# Allegro board datalogger.brd
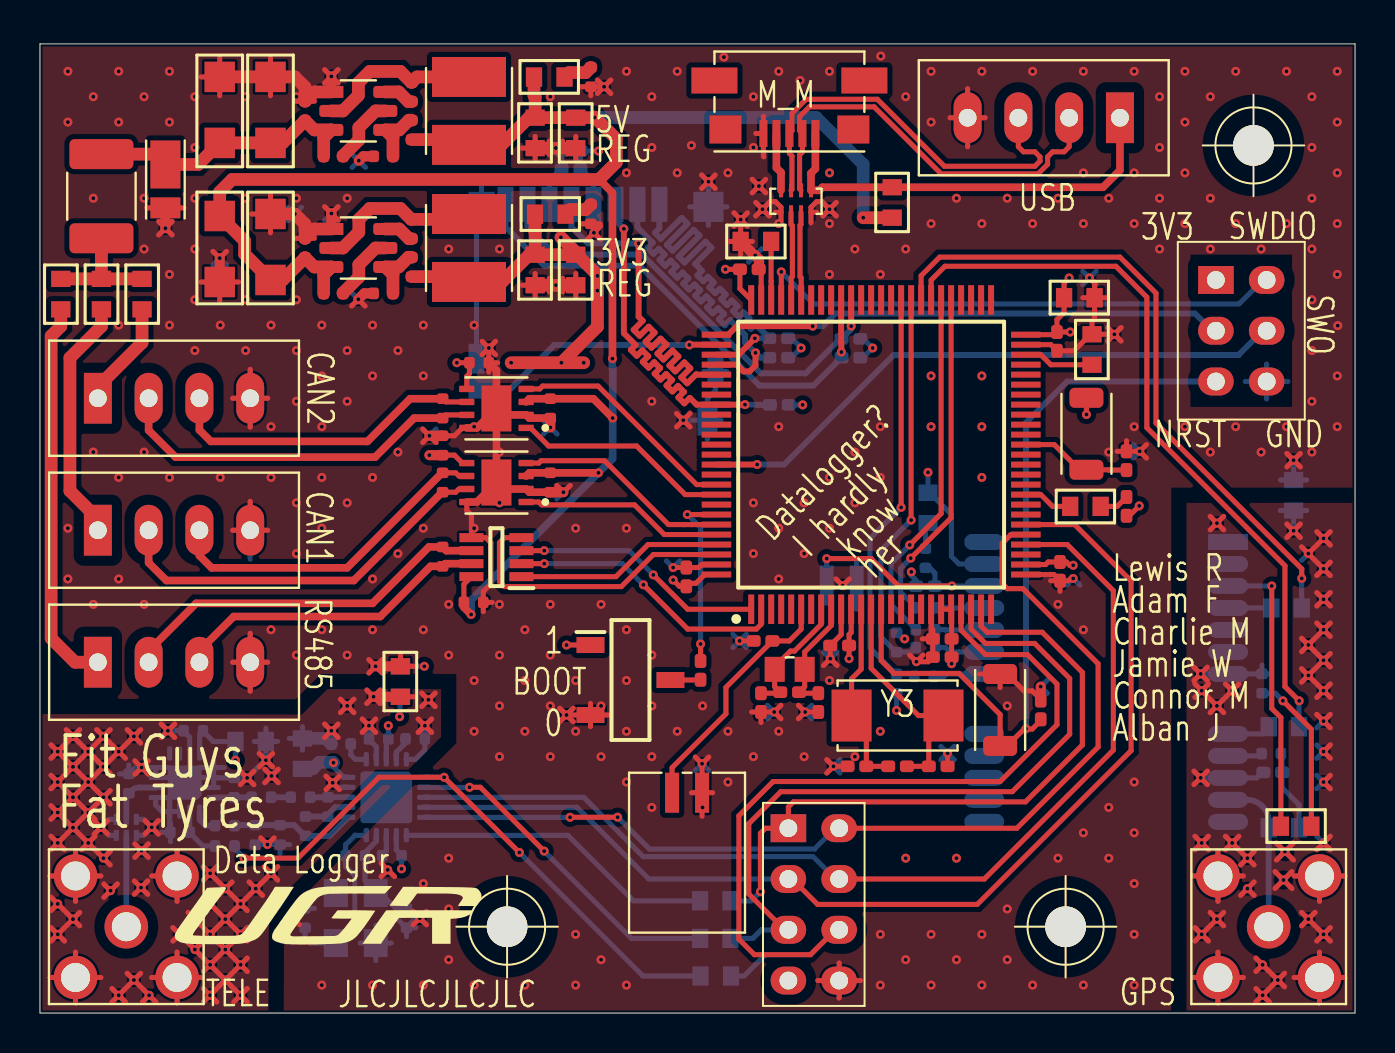
[diagram p0: board, top side]
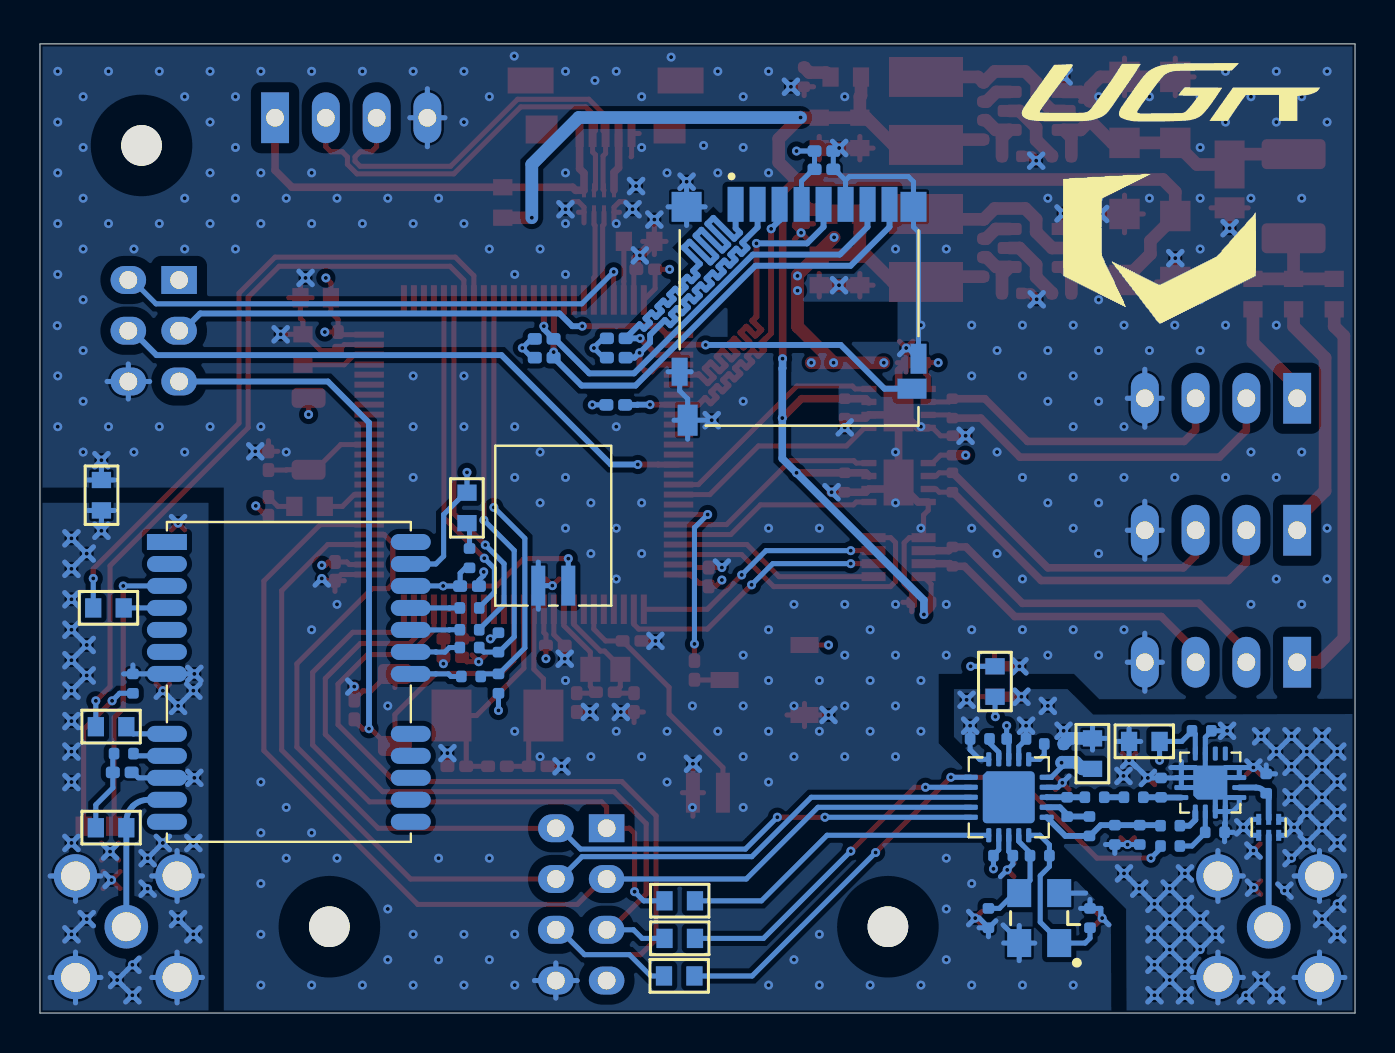
[diagram p1: board, bottom side, seen from below]

Outline 65.79 x 48.49 mm; copper layers: TOP, LAYER2, GNDS, BOTTOM. Coordinates in mm from the lower left corner of the outline.
Outline path: 0,48.49 0,0 65.79,0 65.79,48.49 0,48.49

## Design rules (mm)
constraint set DEFAULT: min track width 0.127, pair gap 0.127
net group D: nets D+ D-
net group DP1: nets N883057 N883071

## Placement (name value [footprint] x y rotation side)
BT1  MS518SE-FL35E  [SEIKO_MS518SE-FL35E]  40.11 28.38 270 bottom
BT2  MS518SE-FL35E  [SEIKO_MS518SE-FL35E]  32.37 4.02 90 top
C1  10u  [GU-C1206]  8.99 46.84 270 top
C2  10u  [GU-C1206]  11.53 46.84 270 top
C3  0.1u  [GU-R0402]  18.6 46.09 270 top
C4  22u  [GU-R0603]  24.77 44.8 270 top
C5  22u  [GU-R0603]  26.8 44.8 270 top
C6  22u  [GU-R0603]  24.77 37.94 270 top
C7  22u  [GU-R0603]  26.8 37.94 270 top
C8  0.1u  [GU-R0402]  18.6 39.23 270 top
C9  10u  [GU-C1206]  8.99 36.58 90 top
C10  10u  [GU-C1206]  11.53 39.98 270 top
C11  0.1u  [GU-R0402]  13.26 45.14 270 top
C12  0.1u  [GU-R0402]  13.26 38.28 270 top
C13  33n  [GU-R0402]  18.77 13.72 0 bottom
C14  1n  [GU-R0402]  17.6 7.87 0 bottom
C15  1u  [GU-R0603]  9.78 13.59 0 bottom
C16  10n  [GU-R0402]  16.94 13.72 0 bottom
C17  220p  [GU-R0402]  7.67 14.12 180 bottom
C18  1.5p  [GU-R0402]  11.07 10.79 0 bottom
C19  0.3p  [GU-R0402]  4.45 11.48 270 bottom
C24  1p  [GU-R0402]  9.7 11.28 270 bottom
C25  8p  [GU-R0402]  18.34 4.75 90 bottom
C26  2.2n  [GU-R0402]  12.01 8.92 90 bottom
C27  4.7p  [GU-R0402]  10.77 8.92 90 bottom
C28  8p  [GU-R0402]  13.26 4.75 270 bottom
C53  0.1u  [GU-R0402]  25.53 26.54 270 top
C54  0.1u  [GU-R0402]  20.14 28.4 270 top
C55  0.1u  [GU-R0402]  21.69 20.55 0 top
C56  0.1u  [GU-R0402]  25.53 30.25 270 top
C57  0.1u  [GU-R0402]  21.97 32.54 180 top
C86  4.7u  [GU-C0603]  52.76 35.79 180 top
C87  100n  [GU-C0402]  40.01 18.39 0 top
C88  100n  [GU-C0402]  51.03 22.1 90 top
C89  100n  [GU-C0402]  50.88 33.6 90 top
C90  100n  [GU-C0402]  35.48 37.21 180 top
C91  100n  [GU-C0402]  32.33 21.82 270 top
C97  1uF  [GU-C0402]  36.17 18.62 0 top
C100  1uF  [GU-C0402]  45.14 18.72 0 top
C101  100nF  [GU-C0402]  45.14 17.81 0 top
C102  1n  [GU-C0402]  26.57 43.13 0 bottom
C103  1n  [GU-C0402]  26.57 42.21 0 bottom
C104  12.5p  [GU-C0402]  36.07 15.53 90 top
C105  2.2u  [GU-C0603]  35.05 38.61 0 top
C106  12.5p  [GU-C0402]  38.94 15.53 90 top
C107  18p  [GU-C0402]  40.87 12.34 0 top
C108  18p  [GU-C0402]  44.93 12.34 180 top
C110  100n  [GU-C0402]  50.06 15.16 270 top
C111  2.2u  [GU-C0603]  52.63 33.96 270 top
C112  47p  [GU-C0402]  61.67 12.04 0 bottom
C113  1u  [GU-C0402]  44.3 21.36 0 bottom
C114  4.7u  [GU-C0603]  13.13 13.74 270 bottom
D1  Green  [GU-C0603]  51.54 25.35 0 top
D2  RED_LED  [GU-R0603]  63.6 9.35 180 top
D3  YELLOW_LED  [GU-R0603]  26.29 39.97 180 top
D5  NSR20F30NXT5G  [GU-C0603]  44.42 26.04 270 bottom
D7  LED_BLUE  [GU-R0603]  26.24 46.83 180 top
D8  NSR20F30NXT5G  [GU-C0603]  3.07 35.21 90 top
D9  MM3Z15VT1G  [DIODES-DFLZ15-7]  6.27 41.71 90 top
D10  NSR20F30NXT5G  [GU-C0603]  5.11 35.21 90 top
D12  NSR20F30NXT5G  [GU-C0603]  1.04 35.21 90 top
D14  NSR20F30NXT5G  [GU-C0603]  42.63 41.32 270 top
F1  1206L075/16WR  [FUSC455X324X85L30]  3.07 40.87 270 top
GPS1  NE0-M9N  [UBLOX_NEO-M9N-00BGNSS]  53.34 16.57 90 bottom
J2  Backup_Tele_Header  [GU-HEADER8]  37.44 9.25 0 top
J4  1981584-1  [TE-1981584-1]  37.49 48.11 180 top
J5  SMA  [GU_SMA_JACK_STR]  4.32 4.32 0 top
J10  CANFD1  [RHDRV4W90P254_4X1]  2.9 24.16 0 top
J19  SWD  [GU-HEADER6]  58.83 36.68 0 top
J20  CANFD2  [RHDRV4W90P254_4X1]  2.9 30.76 0 top
J22  SMA  [GU_SMA_JACK_STR]  61.47 4.32 0 top
J24  RS-485  [RHDRV4W90P254_4X1]  2.9 17.55 0 top
J25  USB Header  [RHDRV4W90P254_4X1]  54.03 44.79 180 top
J26  Micro SD  [HRS_DM3D-SF]  27.79 40.46 0 bottom
L1  4.7u  [INDDFN2_400X400X310L157X370]  21.46 45.14 270 top
L2  4.7u  [INDDFN2_400X400X310L157X370]  21.46 38.28 270 top
L3  3.9n  [GU-R0402]  13.03 10.79 180 bottom
L6  8.2n  [GU-R0402]  14.4 10.31 270 bottom
L7  2.7n  [GU-R0402]  13.28 9.35 270 bottom
L8  30ohms/1.8A  [GU-R0603]  61.47 9.27 0 bottom
NOREF  -  [unnamed]  60.71 43.41 0 top
NOREF#2  -  [#2]  14.25 4.75 0 top
NOREF#3  -  [unnamed]  51.31 4.32 0 top
NOREF#4  -  [unnamed]  23.37 4.32 0 top
NOREF#5  -  [#2]  14.66 34.42 180 bottom
NOREF#6  -  [#2]  9.17 45.92 180 bottom
R1  10k  [GU-R0402]  14.68 42.87 0 top
R2  54.9k  [GU-R0402]  18.6 44.19 270 top
R3  10k  [GU-R0402]  17.17 42.87 0 top
R4  33.2k  [GU-R0402]  18.6 37.33 270 top
R5  10k  [GU-R0402]  17.17 36.01 0 top
R6  10k  [GU-R0402]  14.68 36.01 0 top
R9  22k  [GU-R0402]  15.06 13.46 180 bottom
R10  1k  [GU-R0402]  9.25 9.37 0 bottom
R11  1k  [GU-R0402]  9.25 8.36 180 bottom
R12  20k  [GU-R0402]  7.01 9.04 0 bottom
R13  1M  [GU-R0402]  15.77 7.87 0 bottom
R15  10k  [GU-C0402]  54.36 27.64 90 top
R16  1M  [GU-C0402]  42.9 12.34 0 top
R17  1M  [GU-C0402]  37.5 16.05 0 top
R26  120  [GU-R0402]  20.14 26.54 90 top
R28  120  [GU-R0402]  20.14 30.25 90 top
R46  10k  [GU-C0402]  33.05 17.14 270 top
R53  150  [GU-C0402]  54.36 25.35 270 top
R54  85  [GU-R0402]  27.56 46.83 90 top
R55  65  [GU-R0402]  27.56 39.97 90 top
R56  55  [GU-R0402]  61.14 16.48 270 bottom
R58  2.2k  [GU-R0402]  42.85 18.54 90 bottom
R59  2.2k  [GU-R0402]  42.85 16.48 270 bottom
R60  1.5k  [GU-R0402]  44.3 22.76 90 bottom
R61  10  [GU-R0402]  61.59 12.98 180 bottom
R63  33  [GU-R0402]  44.22 16.84 180 bottom
R64  33  [GU-R0402]  44.3 18.29 180 bottom
R65  33  [GU-R0402]  44.3 19.18 180 bottom
R66  33  [GU-R0402]  44.3 20.27 180 bottom
R68  0  [GU-R0603]  61.47 14.33 0 bottom
R69  0  [GU-R0603]  61.6 20.27 0 bottom
R70  47k  [GU-C0402]  36.96 33.76 180 bottom
R71  47k  [GU-C0402]  36.96 32.79 180 bottom
R72  47k  [GU-C0402]  36.98 30.43 180 bottom
R73  47k  [GU-C0402]  40.56 33.73 180 bottom
R74  47k  [GU-C0402]  40.56 32.79 180 bottom
R75  120  [GU-R0402]  20.14 22.83 270 top
R76  0  [GU-R0603]  33.02 5.61 0 bottom
R77  0  [GU-R0603]  33.05 1.85 0 bottom
R78  0  [GU-R0603]  33.02 3.73 0 bottom
R79  0  [GU-R0603]  62.71 25.15 90 bottom
R81  0  [GU-R0603]  18.01 17.35 270 bottom
R82  0  [GU-R0603]  18.03 17.35 270 top
SW2  TDD01H0SB1R  [SOT175P420X230-3N]  29.54 16.66 0 top
SW3  B3U-1000P  [OMRON_B3U-1000P]  52.35 28.98 270 top
SW4  B3U-1000P  [OMRON_B3U-1000P]  48.03 15.16 270 top
U1  TPS56220XXX  [SOT23-6P95_280X145L45X37]  15.93 45.14 270 top
U2  TPS56220XXX  [SOT23-6P95_280X145L45X37]  15.93 38.28 270 top
U3  ECMF02-4CMX8  [SON8P50_250X120X55L40X20]  37.82 40.61 180 top
U4  nRF24L01  [QFN21P50_400X400X95L40X24T260N]  17.32 10.79 270 bottom
U5  RFX2401C  [QFN17P50_300X300X55L40X25T170]  7.24 11.53 270 bottom
U8  MCP2562FD-E/MF  [SON65P300X300X80-9N]  22.83 26.54 180 top
U10  MCP2562FD-E/MF  [SON65P300X300X80-9N]  22.83 30.25 180 top
U12  2450LP14A100T  [RESCAXE6P50_160X80X70L15X20]  4.32 9.29 0 bottom
U13  STM32H743VIT6  [QFP50P1600X1600X160-100N]  41.58 27.94 90 top
U14  MAX3062EEKA+T  [SOT65P280X145-8N]  22.83 22.81 180 top
Y2  16MHz  [SG-310]  15.8 4.75 90 bottom
Y3  25MHz  [XTALDFN2_600X350X140]  42.9 14.88 0 top
Y4  32.768KHz  [X2-SMD-L20X12X055MM]  37.5 17.2 0 top

## Library data of the parts
BT1 BT2 = BATTERY
C1-C19 C24-C28 C53-C57 C86-C91 C97 C100-C108 C110-C114 = C
D1-D3 D7 = LED
D5 = DIODE SCHOTTKY13_0
D8 D10 D12 D14 = DIODE SCHOTTKY
D9 = DIODE ZENER
F1 = FUSE
GPS1 = NE0-M9N_2
J2 = CON8
J4 J5 J22 = CON5
J10 J20 J24 J25 = CON4
J19 = CON6
J26 = CON14_13
L1-L3 L6 L7 = L
L8 = CHOKE FERRITE
R1-R6 R9-R13 R15-R17 R26 R28 R46 R53-R56 R58-R61 R63-R66 R68-R79 R81 R82 = R
SW2 = SW KEY-SPDT_0
SW3 SW4 = SW KEY-SPST
U1 U2 = TPS56220_0
U3 = DDProtec_0
U4 = NRF24L01P-R_1
U5 = RFX2401C_0
U8 U10 = MCP2562FD_0
U12 = 2450LP14A100T
U13 = STM32H743VIT6
U14 = MAX3062EEKA+T
Y2 = 12MHz KX-7 20pF_0
Y3 Y4 = 32.768kHz

## Footprints (pads in the part's own frame, mm; a bottom-side part is the same pattern mirrored in y, then rotated)
DIODES-DFLZ15-7
  rect 2.4x1.5 smd: 1(0.75,0)
  rect 1.05x1.5 smd: 2(-1.42,0)
FUSC455X324X85L30
  rrect 1.5x3.2 smd: 1(-2.105,0) 2(2.105,0)
GU-C0402
  rrect 0.7x0.58 smd: 1(-0.47,0) 2(0.47,0)
GU-C0603
  rect 0.813x0.965 smd: 1(0,0) 2(1.524,0)
GU-C1206
  rect 1.524x1.524 smd: 1(0,0) 2(3.302,0)
GU-HEADER6
  rect 1.778x1.397 hole 0.889: 1(0,0)
  oval 1.778x1.397 hole 0.889: 2(2.54,0) 3(0,-2.54) 4(2.54,-2.54) 5(0,-5.08) 6(2.54,-5.08)
GU-HEADER8
  rect 1.778x1.397 hole 0.889: 1(0,0)
  oval 1.778x1.397 hole 0.889: 2(2.54,0) 3(0,-2.54) 4(2.54,-2.54) 5(0,-5.08) 6(2.54,-5.08) 7(0,-7.62) 8(2.54,-7.62)
GU-R0402
  rrect 0.53x0.58 smd: 1(-0.485,0) 2(0.485,0)
GU-R0603
  rect 0.813x0.965 smd: 1(0,0) 2(1.524,0)
GU_SMA_JACK_STR
  round 2.18 hole 1.45: 1(0,0) 2(-2.54,2.54) 3(2.54,2.54) 4(2.54,-2.54) 5(-2.54,-2.54)
HRS_DM3D-SF
  rect 0.8x1.75 smd: 1(3.2,0) 2(2.1,0) 3(1,0) 4(-0.1,0) 5(-1.2,0) 6(-2.3,0) 7(-3.4,0) 8(-4.5,0)
  rect 1.3x1.5 smd: S1(-5.7,0.125)
  rect 1.5x1.5 smd: S2(5.65,0.125)
  rect 0.8x1.5 smd: S3(-5.95,7.725)
  rect 0.8x1.4 smd: S4(6,8.375)
  rect 1x1.55 smd: SW-A(5.6,10.8)
  rect 1.45x1 smd: SW-B(-5.625,9.225)
INDDFN2_400X400X310L157X370
  rect 2x3.7 smd: 1(-1.7,0) 2(1.7,0)
OMRON_B3U-1000P
  rrect 1x1.7 smd: 1(-1.8,0) 2(1.8,0)
QFN17P50_300X300X55L40X25T170
  rrect 0.25x0.7 smd: 1(-0.75,-1.45) 2(-0.25,-1.45) 3(0.25,-1.45) 4(0.75,-1.45) 9(0.75,1.45) 10(0.25,1.45) 11(-0.25,1.45) 12(-0.75,1.45)
  rrect 0.7x0.25 smd: 5(1.45,-0.75) 6(1.45,-0.25) 7(1.45,0.25) 8(1.45,0.75) 13(-1.45,0.75) 14(-1.45,0.25) 15(-1.45,-0.25) 16(-1.45,-0.75)
  rrect 1.7x1.7 smd: 17(0,0)
QFN21P50_400X400X95L40X24T260N
  rrect 0.26x0.71 smd: 1(-1,-1.9) 2(-0.5,-1.9) 3(0,-1.9) 4(0.5,-1.9) 5(1,-1.9) 11(1,1.9) 12(0.5,1.9) 13(0,1.9) 14(-0.5,1.9) 15(-1,1.9)
  rrect 0.71x0.26 smd: 6(1.9,-1) 7(1.9,-0.5) 8(1.9,0) 9(1.9,0.5) 10(1.9,1) 16(-1.9,1) 17(-1.9,0.5) 18(-1.9,0) 19(-1.9,-0.5) 20(-1.9,-1)
  custom 2.6x2.6 smd: 21(0,0)
QFP50P1600X1600X160-100N
  rect 1.475x0.3 smd: 1(-7.738,6) 2(-7.738,5.5) 3(-7.738,5) 4(-7.738,4.5) 5(-7.738,4) 6(-7.738,3.5) 7(-7.738,3) 8(-7.738,2.5) 9(-7.738,2) 10(-7.738,1.5) 11(-7.738,1) 12(-7.738,0.5) 13(-7.738,0) 14(-7.738,-0.5) 15(-7.738,-1) 16(-7.738,-1.5) 17(-7.738,-2) 18(-7.738,-2.5) 19(-7.738,-3) 20(-7.738,-3.5) 21(-7.738,-4) 22(-7.738,-4.5) 23(-7.738,-5) 24(-7.738,-5.5) 25(-7.738,-6) 51(7.738,-6) 52(7.738,-5.5) 53(7.738,-5) 54(7.738,-4.5) 55(7.738,-4) 56(7.738,-3.5) 57(7.738,-3) 58(7.738,-2.5) 59(7.738,-2) 60(7.738,-1.5) 61(7.738,-1) 62(7.738,-0.5) 63(7.738,0) 64(7.738,0.5) 65(7.738,1) 66(7.738,1.5) 67(7.738,2) 68(7.738,2.5) 69(7.738,3) 70(7.738,3.5) 71(7.738,4) 72(7.738,4.5) 73(7.738,5) 74(7.738,5.5) 75(7.738,6)
  rect 0.3x1.475 smd: 26(-6,-7.738) 27(-5.5,-7.738) 28(-5,-7.738) 29(-4.5,-7.738) 30(-4,-7.738) 31(-3.5,-7.738) 32(-3,-7.738) 33(-2.5,-7.738) 34(-2,-7.738) 35(-1.5,-7.738) 36(-1,-7.738) 37(-0.5,-7.738) 38(0,-7.738) 39(0.5,-7.738) 40(1,-7.738) 41(1.5,-7.738) 42(2,-7.738) 43(2.5,-7.738) 44(3,-7.738) 45(3.5,-7.738) 46(4,-7.738) 47(4.5,-7.738) 48(5,-7.738) 49(5.5,-7.738) 50(6,-7.738) 76(6,7.738) 77(5.5,7.738) 78(5,7.738) 79(4.5,7.738) 80(4,7.738) 81(3.5,7.738) 82(3,7.738) 83(2.5,7.738) 84(2,7.738) 85(1.5,7.738) 86(1,7.738) 87(0.5,7.738) 88(0,7.738) 89(-0.5,7.738) 90(-1,7.738) 91(-1.5,7.738) 92(-2,7.738) 93(-2.5,7.738) 94(-3,7.738) 95(-3.5,7.738) 96(-4,7.738) 97(-4.5,7.738) 98(-5,7.738) 99(-5.5,7.738) 100(-6,7.738)
RESCAXE6P50_160X80X70L15X20
  rect 0.25x0.55 smd: 1(-0.5,-0.4) 2(0,-0.4) 3(0.5,-0.4) 4(0.5,0.4) 5(0,0.4) 6(-0.5,0.4)
RHDRV4W90P254_4X1
  rect 1.397x2.54 hole 0.889: 1(0,0)
  oval 1.397x2.54 hole 0.889: 2(2.54,0) 3(5.08,0) 4(7.62,0)
SEIKO_MS518SE-FL35E
  rect 2x0.7 smd: 1(7,0.75) 2(7,-0.75)
SG-310
  rect 1.4x1.2 smd: 1(-1.25,-1) 2(1.25,-1) 3(1.25,1) 4(-1.25,1)
SON8P50_250X120X55L40X20
  rect 0.2x0.7 smd: 1(-0.75,-0.55) 2(-0.25,-0.55) 3(0.25,-0.55) 4(0.75,-0.55) 5(0.75,0.55) 6(0.25,0.55) 7(-0.25,0.55) 8(-0.75,0.55)
SON65P300X300X80-9N
  custom 0.76x0.32 smd: 1(-1.485,0.975) 2(-1.485,0.325) 3(-1.485,-0.325) 4(-1.485,-0.975) 5(1.485,-0.975) 6(1.485,-0.325) 7(1.485,0.325) 8(1.485,0.975)
  rect 1.5x2.3 smd: 9(0,0)
SOT23-6P95_280X145L45X37
  rect 0.6x1.2 smd: 1(-0.95,-1.35)
  rrect 0.6x1.2 smd: 2(0,-1.35) 3(0.95,-1.35) 4(0.95,1.35) 5(0,1.35) 6(-0.95,1.35)
SOT65P280X145-8N
  rect 1.2x0.45 smd: 1(-1.25,0.975) 2(-1.25,0.325) 3(-1.25,-0.325) 4(-1.25,-0.975) 5(1.25,-0.975) 6(1.25,-0.325) 7(1.25,0.325) 8(1.25,0.975)
SOT175P420X230-3N
  rect 1.4x0.8 smd: 1(-2,1.75) 2(-2,-1.75) 3(2,0)
TE-1981584-1
  rect 2.3x1.3 smd: (-3.75,1.45) (3.75,1.45)
  rect 1.6x1.4 smd: (-3.2,3.9) (3.2,3.9)
  rect 0.4x1.35 smd: 1(-1.3,4.1) 2(-0.65,4.1) 3(0,4.1) 4(0.65,4.1) 5(1.3,4.1)
UBLOX_NEO-M9N-00BGNSS
  rect 0.8x2 smd: 1(7,6.1)
  oval 0.8x2 smd: 2(5.9,6.1) 3(4.8,6.1) 4(3.7,6.1) 5(2.6,6.1) 6(1.5,6.1) 7(0.4,6.1) 8(-2.6,6.1) 9(-3.7,6.1) 10(-4.8,6.1) 11(-5.9,6.1) 12(-7,6.1) 13(-7,-6.1) 14(-5.9,-6.1) 15(-4.8,-6.1) 16(-3.7,-6.1) 17(-2.6,-6.1) 18(0.4,-6.1) 19(1.5,-6.1) 20(2.6,-6.1) 21(3.7,-6.1) 22(4.8,-6.1) 23(5.9,-6.1) 24(7,-6.1)
unnamed
  round 2.032 hole 3.962 unplated: (0,0)
X2-SMD-L20X12X055MM
  rect 1x1.25 smd: 1(-0.75,0) 2(0.75,0)
XTALDFN2_600X350X140
  rect 2x2.6 smd: 1(-2.3,0) 2(2.3,0)

## Nets
3V3: C6.1 C7.1 C14.2 C54.2 C57.2 C86.2 C87.2 C88.2 C89.2 C90.2 C91.2 C100.2 C101.2 C102.2 C103.2 D3.2 D5.1 GPS1.23 J2.7 J19.1 J26.4 L2.2 R4.2 R53.2 R58.2 R59.2 R70.1 R71.1 R72.1 R73.1 R74.1 R81.1 SW2.1 SW3.1 U4.7 U8.5 U10.5 U13.11 U13.20 U13.21 U13.27 U13.50 U13.75 U13.100
3V3_TELE: C15.1 C16.2 C17.1 C114.2 R81.2 U4.15 U4.18 U5.16(VDD2)
5V: C4.1 C5.1 C9.2 C10.2 C12.2 C53.1 C55.1 C56.1 D7.2 D14.2(CATHODE) L1.2 R2.2 R6.1 U2.3(VIN) U8.3 U10.3 U14.8(VCC)
12V: C1.2 C2.2 C11.2 D9.1(CATHODE) F1.1 R1.1 U1.3(VIN)
GND: BT1.2(-) BT2.2(-) C1.1 C2.1 C4.2 C5.2 C6.2 C7.2 C9.1 C10.1 C11.1 C12.1 C14.1 C25.1 C28.1 C53.2 C54.1 C55.2 C56.2 C57.1 C86.1 C87.1 C88.1 C89.1 C90.1 C91.1 C97.1 C100.1 C101.1 C102.1 C103.1 C104.1 C105.1 C106.1 C107.1 C108.1 C110.1 C111.1 C113.1 D9.2 J2.8 J4.5 J10.4 J19.6 J20.4 J24.4 J25.4 J26.6 J26.S1 J26.S2 J26.S3 J26.S4 J26.SW-A R3.1 R5.1 R15.2 R54.1 R55.1 R79.2 R82.1 SW2.2(NO) SW4.1 U1.1 U2.1 U3.5 U3.8 U4.8 U8.2(VSS) U8.8 U8.9 U10.2(VSS) U10.8 U10.9 U13.10 U13.19(VSSA) U13.26 U13.49 U13.74 U13.99 U14.5 Y2.2 Y2.4
GND_GPS: C112.1 GPS1.7 GPS1.10 J22.2 J22.3 J22.4 J22.5 R56.1 R79.1
GND_TELE: C13.2 C15.2 C16.1 C17.2 C19.1 C24.1 C26.1 C27.1 C114.1 J5.2 J5.3 J5.4 J5.5 R9.2 R12.1 R82.2 U4.14 U4.17 U4.20 U5.1 U5.2 U5.3 U5.7 U5.8 U5.9 U5.11 U5.12 U5.15 U5.17 U12.1 U12.3 U12.4 U12.6
VBAT: BT2.1 C97.2 U13.6
VCC_RF: GPS1.9 R61.2
A: J24.2 R75.1 U14.6
B: J24.3 R75.2 U14.7
BACKUP: BT1.1 C113.2 GPS1.22(V_BKCP) R60.1
CANH_1: J10.2 R26.1 U8.7
CANH_2: J20.2 R28.1 U10.7
CANL_1: J10.3 R26.2 U8.6
CANL_2: J20.3 R28.2 U10.6
CARD_DET: J26.SW-B U13.77
CE1: J2.6 R77.2 U13.22
CEM1: R11.1 R77.1 U4.1
CS1: J2.5 R78.2 U13.23
D+: U3.6 U13.71
D-: U3.7 U13.70
FDCAN1_RX: U8.4 U13.95
FDCAN1_TX: U8.1 U13.96
FDCAN2_RX: U10.4 U13.91
FDCAN2_TX: U10.1 U13.92
GPS_ANT1: GPS1.11 J22.1 L8.1
GPS_INT: R69.2 U13.58
GPS_RESET: R68.2 U13.57
GREENLED: D1.1(CATHODE) U13.34
I2C4_SCL: R58.1 R64.2 U13.59
I2C4_SDA: R59.1 R63.2 U13.60
IRQ1: J2.1 R76.2 U13.24
NRST: C110.2 J19.5 SW4.2 U13.14
PPS: D2.2 GPS1.3
RS-485_RX_EN: U13.2 U14.2
RS-485_TX_EN: U13.1 U14.3
SAFE: GPS1.1
SDMMC1_CK: J26.5 U13.80
SDMMC1_CMD: J26.3 R72.2 U13.83
SDMMC1_D0: J26.7 R73.2 U13.65
SDMMC1_D1: J26.8 R74.2 U13.66
SDMMC1_D2: J26.1 R70.2 U13.78
SDMMC1_D3: J26.2 R71.2 U13.79
SPI1_MISO: J2.2 U4.5 U13.30
SPI1_MOSI: J2.3 U4.4 U13.31
SPI1_SCK: J2.4 U4.3 U13.29
SWCLK: J19.3 U13.76
SWDIO: J19.2 U13.72
SWO: J19.4 U13.89
UART8_RX: U13.97 U14.1
UART8_TX: U13.98 U14.4
USART3_RX: R65.2 U13.56
USART3_TX: R66.2 U13.55
N25333: C3.1 L1.1 U1.2
N25483: C3.2 U1.6
N25551: R2.1 R3.2 U1.4
N25555: D7.1(CATHODE) R54.2
N25937: C8.1 L2.1 U2.2
N26095: C8.2 U2.6
N26147: R6.2 U2.5
N26159: R4.1 R5.2 U2.4
N254671: D2.1(CATHODE) R56.2
N832920: C19.2 U5.10 U12.2
N832974: L3.1 L6.1 U4.13
N832982: C18.2 L3.2
N832986: C18.1 C24.2 U5.4
N833008: L6.2 L7.1 U4.12
N833118: C26.2 C27.2 L7.2 R10.2 U4.11
N833206: R10.1 U5.5
N833210: R11.2 R12.2 U5.6
N833264: C25.2 R13.2 U4.9(XC2) Y2.3
N833268: C28.2 R13.1 U4.10 Y2.1
N859601: GPS1.8 R68.1
N859687: GPS1.4 R69.1
N859709: C112.2 L8.2 R61.1
N859781: GPS1.18 R63.1
N859811: GPS1.19 R64.1
N872940: R46.2 SW2.3
N873792: C105.2 U13.73
N873876: C104.2 R17.1 U13.8 Y4.1
N873990: C106.2 R17.2 U13.9 Y4.2
N874102: C107.2 R16.1 U13.12 Y3.1
N874244: C108.2 R16.2 U13.13 Y3.2
N874484: R15.1 SW3.2 U13.39
N874496: C111.2 U13.48
N874690: D1.2 R53.1
N877738: D8.1 J10.1
N877742: D8.2(CATHODE) D10.2(CATHODE) D12.2(CATHODE) F1.2
N879953: D12.1 J24.1
N882979: D14.1 J4.1 J25.1 U3.1(VBUS)
N883057: J4.2 J25.2 U3.2
N883071: J4.3 J25.3 U3.3
N883081: J4.4 U3.4
N887014: D3.1(CATHODE) R55.2
N891557: D5.2(CATHODE) R60.2
N903471: R9.1 U4.16
N903475: C13.1 U4.19
N934660: R1.2 U1.5
N938835: J5.1 U12.5(OUT)
N999068: R46.1 U13.94
N1034830: GPS1.20 R65.1
N1034834: GPS1.21 R66.1
N1083595: R78.1 U4.2
N8327305: R76.1 U4.6
N8775560: D10.1 J20.1

Pads without a net: GPS1 2 5 6 12 13 14 15 16 17 24; U4 21; U5 13 14; U13 3 4 5 7 15 16 17 18 25 28 32 33 35 36 37 38 40 41 42 43 44 45 46 47 51 52 53 54 61 62 63 64 67 68 69 81 82 84 85 86 87 88 90 93

## Via types
v1: diameter 0.45, hole 0.2, TOP to BOTTOM, 466 vias

## Routing (per net, layer and track width the routed paths; a pad name or vN(x,y) marks a point on that pad's centre or on a via; arc(x,y) is an arc through that point)
3V3: length 123.4
  TOP w0.254: v1(31.67,21.67) 31.99,21.35 C91.2 32.49,21.5 32.82,21.5 33.25,21.94 U13.100 ; U13.11 40.58,19.04 40.47,18.93 C87.2 v1(40.47,17.73) ; R53.2 54.5,24.88 v1(54.99,25.37) ; U10.5 21.35,31.86 21.48,31.99 C57.2 v1(20.85,32.54) ; C89.2 50.74,33.94 U13.50 ; C89.2 v1(51.54,34.07) ; C89.2 50.88,34.7 51.23,35.05 C86.2 51.23,36.53 v1(51.49,36.78) ; U8.5 21.13,27.52 20.74,27.91 C54.2 ; v1(34.29,37.21) C90.2 35.01,36.24 U13.75 ; U13.20 U13.21 45.61,20.18 C100.2 C101.2 v1(45.61,17.48) ; SW3.1 v1(52.35,29.95) ; v1(51.69,22.4) 51.51,22.4 51.35,22.57 C88.2 50.44,22.57 50.31,22.44 U13.27 ; SW2.1 v1(26.34,18.41)
  TOP w0.508: C54.2 v1(19.48,27.91)
  TOP w0.635: v1(26.09,32.54) 27.89,34.34 v1(27.89,36.14) v1(27.89,36.88) 27.89,36.93 26.88,37.94 C7.1 ; v1(26.09,32.54) v1(23.57,32.54) ; v1(26.09,32.54) v1(27.2,32.54) ; C6.1 C7.1 ; C6.1 24.77,39.04 24.77,39.04 D3.2 ; C6.1 24.48,37.94 23.12,36.58 L2.2 21.2,36.84 R4.2 ; C7.1 26.8,38.07 v1(26.06,38.81)
  LAYER2 w0.254: 40.14,18.07 v1(40.47,17.73) ; v1(40.47,17.73) 40.81,18.07 ; v1(40.47,17.73) 40.81,17.39 ; v1(40.47,17.73) 40.14,17.39 ; 18.89,17.01 v1(19.23,17.35) ; v1(19.23,17.35) 18.89,17.68 ; v1(19.23,17.35) 19.56,17.68 ; v1(19.23,17.35) 19.56,17.01 ; v1(23.57,32.54) 23.91,32.2 ; v1(23.57,32.54) 23.24,32.87 ; v1(23.57,32.54) 23.91,32.87 ; v1(23.57,32.54) 23.24,32.2 ; 54.65,25.71 v1(54.99,25.37) ; v1(54.99,25.37) 55.33,25.04 ; v1(54.99,25.37) 54.65,25.04 ; v1(54.99,25.37) 55.33,25.71 ; 25.72,38.48 v1(26.06,38.81) ; v1(26.06,38.81) 25.72,39.15 ; v1(26.06,38.81) 26.4,38.48 ; v1(26.06,38.81) 26.4,39.15 ; v1(41.66,33.27) 41.99,33.61 ; v1(41.66,33.27) 41.99,32.94 ; v1(41.66,33.27) 41.32,32.94 ; v1(41.66,33.27) 41.32,33.61 ; 26.87,32.87 v1(27.2,32.54) ; v1(27.2,32.54) 27.54,32.2 ; v1(27.2,32.54) 26.87,32.2 ; v1(27.2,32.54) 27.54,32.87 ; 25.75,32.87 v1(26.09,32.54) ; v1(26.09,32.54) 25.75,32.2 ; v1(26.09,32.54) 26.42,32.2 ; v1(26.09,32.54) 26.42,32.87 ; 51.15,36.44 v1(51.49,36.78) ; v1(51.49,36.78) 51.82,37.12 ; v1(51.49,36.78) 51.15,37.12 ; v1(51.49,36.78) 51.82,36.44 ; v1(38.07,33.27) 38.41,32.94 ; v1(38.07,33.27) 38.41,33.61 ; v1(38.07,33.27) 37.74,32.94 ; v1(38.07,33.27) 37.74,33.61 ; v1(19.48,27.91) 19.82,28.25 ; v1(19.48,27.91) 19.82,27.58 ; v1(19.48,27.91) 19.14,27.58 ; v1(19.48,27.91) 19.14,28.25 ; 37.44,0.75 J2.7 ; J2.7 38.51,1.63 ; J2.7 36.37,1.63 ; J2.7 37.44,2.5 ; 27.6,43.47 v1(27.94,43.13) ; v1(27.94,43.13) 27.6,42.79 ; v1(27.94,43.13) 28.28,43.47 ; v1(27.94,43.13) 28.28,42.79 ; 42.92,18.38 v1(43.26,18.72) ; v1(43.26,18.72) 42.92,19.06 ; v1(43.26,18.72) 43.59,18.38 ; v1(43.26,18.72) 43.59,19.06 ; v1(52.35,29.95) 52.69,30.28 ; v1(52.35,29.95) 52.01,30.28 ; v1(52.35,29.95) 52.69,29.61 ; v1(52.35,29.95) 52.01,29.61 ; 58.83,35.8 J19.1 ; J19.1 57.76,36.68 ; J19.1 59.89,36.68 ; J19.1 58.83,37.55 ; 33.95,36.87 v1(34.29,37.21) ; v1(34.29,37.21) 33.95,37.55 ; v1(34.29,37.21) 34.63,36.87 ; v1(34.29,37.21) 34.63,37.55 ; 44.09,27.39 v1(44.42,27.05) ; v1(44.42,27.05) 44.76,27.39 ; v1(44.42,27.05) 44.09,26.71 ; v1(44.42,27.05) 44.76,26.71 ; 26,18.08 v1(26.34,18.41) ; v1(26.34,18.41) 26.68,18.75 ; v1(26.34,18.41) 26,18.75 ; v1(26.34,18.41) 26.68,18.08 ; 27.55,35.81 v1(27.89,36.14) ; v1(27.89,36.14) 27.55,36.48 ; v1(27.89,36.14) 28.23,35.81 ; v1(27.89,36.14) 28.23,36.48 ; 42.51,14.8 v1(42.85,15.14) ; v1(42.85,15.14) 43.19,14.8 ; v1(42.85,15.14) 42.51,15.47 ; v1(42.85,15.14) 43.19,15.47 ; 45.27,17.81 v1(45.61,17.48) ; v1(45.61,17.48) 45.94,17.14 ; v1(45.61,17.48) 45.27,17.14 ; v1(45.61,17.48) 45.94,17.81 ; 37.82,30.77 v1(38.15,30.43) ; v1(38.15,30.43) 38.49,30.77 ; v1(38.15,30.43) 38.49,30.09 ; v1(38.15,30.43) 37.82,30.09 ; 31.34,21.33 v1(31.67,21.67) 32.01,21.33 ; v1(18.09,7.21) 18.42,7.55 ; v1(18.09,7.21) 18.42,6.88 ; v1(18.09,7.21) 17.75,7.55 ; 20.52,32.2 v1(20.85,32.54) ; v1(20.85,32.54) 20.52,32.87 ; v1(20.85,32.54) 21.19,32.2 ; v1(20.85,32.54) 21.19,32.87 ; v1(27.89,36.88) 28.23,36.54 ; v1(27.89,36.88) 28.23,37.22 ; v1(27.89,36.88) 27.55,37.22 ; v1(27.89,36.88) 27.55,36.54 ; 51.2,33.74 v1(51.54,34.07) ; v1(51.54,34.07) 51.2,34.41 ; v1(51.54,34.07) 51.87,34.41 ; v1(51.54,34.07) 51.87,33.74 ; 51.35,22.74 v1(51.69,22.4) 52.03,22.74
  BOTTOM w0.254: v1(43.26,18.72) 43.16,18.72 R58.2 ; v1(18.09,7.21) C14.2 18.09,7.9 17.82,8.16 U4.7 ; v1(27.94,43.13) C102.2 C103.2 27.1,42.21 27.69,41.63 J26.4 ; R81.1 v1(19.23,17.35) ; v1(44.42,27.05) D5.1 44.5,26.04 45.59,24.94 45.59,22.86 45.98,22.47 GPS1.23 ; R71.1 37.59,32.79 v1(38.07,33.27) 38.1,33.27 37.62,33.76 R70.1 ; R59.2 v1(42.85,15.14) ; R72.1 v1(38.15,30.43) ; R73.1 41.2,33.73 v1(41.66,33.27) 41.17,32.79 R74.1
3V3_TELE: length 16.3
  LAYER2 w0.254: 17.66,15.16 v1(17.99,14.83) ; v1(17.99,14.83) 18.33,15.16 ; v1(17.99,14.83) 18.33,14.49 ; v1(17.43,14.38) 17.76,14.04 ; v1(17.43,14.38) 17.09,14.04 ; v1(17.43,14.38) 17.09,14.71 ; 14.35,12.19 v1(14.68,12.52) ; v1(14.68,12.52) 15.02,12.19 ; v1(14.68,12.52) 14.35,12.86 ; v1(14.68,12.52) 15.02,12.86 ; v1(9.78,12.65) 10.12,12.31 ; v1(9.78,12.65) 9.44,12.99 ; v1(9.78,12.65) 9.44,12.31 ; v1(9.78,12.65) 10.12,12.99
  BOTTOM w0.254: U4.15 15.2,11.79 14.68,12.31 v1(14.68,12.52) ; U4.18 17.32,13.61 C16.2 v1(17.43,14.38) ; U5.16 7.99,13.96 C17.1 8.16,14.1 8.66,13.59 C15.1 v1(9.78,12.65) ; R81.2 18.01,14.84 v1(17.99,14.83)
  BOTTOM w0.635: v1(14.68,12.52) 14.66,12.55 13.97,12.55 13.64,12.22 C114.2
5V: length 99.9
  TOP w0.254: v1(27.74,44.81) 27.74,44.83 ; U14.8 21.21,21.46 C55.1
  TOP w0.381: C55.1 21.21,20.3 v1(21.57,19.94) ; v1(28.65,29.77) 27.68,30.74 C56.1 24.48,30.74 U10.3 ; U8.3 24.48,27.03 C53.1 v1(27.94,27.03) ; 27.97,41.71 28.64,41.04 v1(28.64,32.74)
  TOP w0.635: D14.2 v1(41.18,39.79) ; C4.1 24.45,44.8 23.09,43.44 L1.2 21.2,43.7 R2.2 ; C4.1 24.77,45.85 24.71,45.9 D7.2 ; C4.1 C5.1 27.73,44.8 v1(27.74,44.81) ; 27.74,44.83 28.83,43.74 28.83,42.56 27.97,41.71 9.61,41.71 8.99,41.08 C9.2 10.24,38.63 10.24,37.97 11.53,36.68 12.14,36.68 C12.2 13.72,37.33 U2.3 14.19,36.94 R6.1
  BOTTOM w0.381: v1(21.57,19.94) 21.57,20.66 v1(27.94,27.03) 28.65,27.74 v1(28.65,29.77) 28.65,32.25 28.64,32.26 v1(28.64,32.74)
  BOTTOM w0.635: v1(27.74,44.81) 38.84,44.81 41.18,42.46 v1(41.18,39.79)
12V: length 14.3
  TOP w0.635: R1.1 14.19,43.8 U1.3 13.72,44.19 C11.2 12.14,43.54 C2.2 C1.2 7.91,42.46 D9.1 5.76,42.97 F1.1
GND: length 441.3
  TOP w0.254: 27.88,46.68 v1(28.22,46.34) ; v1(28.22,46.34) R54.1 ; v1(28.22,46.34) 28.56,46.01 ; v1(28.22,46.34) 28.56,46.68 ; v1(28.22,46.34) 27.88,46.01 ; 53.89,28.11 R15.2 ; R15.2 v1(55.02,28.11) ; R15.2 54.36,28.63 ; v1(17.4,7.16) 17.74,6.83 ; v1(17.4,7.16) 17.06,6.83 ; v1(17.4,7.16) 17.06,7.5 ; 13.73,38.76 C12.1 12.79,38.76 ; v1(27.71,39.04) 28.05,38.7 ; v1(27.71,39.04) 28.05,39.38 ; v1(27.71,39.04) 27.71,39.33 R55.1 ; v1(27.71,39.04) 27.38,38.7 ; U13.99 33.09,22.44 32.94,22.29 C91.1 v1(31.67,22.29) ; J4.5 36.19,44.86 ; J4.5 35.81,44.01 ; J4.5 36.19,42.86 36.22,42.84 ; C1.1 8.99,47.78 ; C1.1 8.05,46.84 ; C1.1 8.99,45.9 ; v1(33.44,41.59) 33.77,41.93 ; v1(33.44,41.59) 33.1,41.93 ; v1(33.44,41.59) 33.1,41.26 ; v1(33.44,41.59) 33.77,41.26 ; v1(19,4.75) 19.34,4.41 ; v1(19,4.75) 18.66,5.09 ; v1(19,4.75) 19.34,5.09 ; v1(19,4.75) 18.66,4.41 ; 53.41,33.62 v1(53.75,33.96) ; v1(53.75,33.96) C111.1 ; v1(53.75,33.96) 54.08,34.3 ; v1(53.75,33.96) 54.08,33.62 ; v1(53.75,33.96) 53.41,34.3 ; U3.8 38.85,40.06 ; U3.8 38.57,39.54 ; U3.8 38.57,40.31 38.85,40.59 39.12,40.59 v1(39.5,40.22) ; C88.1 50.72,21.94 U13.26 ; C88.1 51.03,21.1 ; C88.1 51.45,21.63 51.56,21.74 v1(51.69,21.74) ; C88.1 50.56,21.63 ; U10.8 21.13,29.28 20.74,28.88 C54.1 ; 34.72,39.36 v1(35.05,39.7) ; v1(35.05,39.7) C105.1 ; v1(35.05,39.7) 35.39,40.04 ; v1(35.05,39.7) 35.39,39.36 ; v1(35.05,39.7) 34.72,40.04 ; 5.94,39.6 v1(6.27,39.27) ; v1(6.27,39.27) 6.61,39.6 ; v1(6.27,39.27) 6.61,38.93 ; v1(6.27,39.27) 5.94,38.93 ; 25.85,26.39 v1(26.19,26.06) 26.52,26.39 ; J2.8 39.98,2.5 ; J2.8 39.98,0.75 ; J2.8 41.05,1.63 ; J2.8 38.91,1.63 ; 39.36,12.68 v1(39.7,12.34) ; v1(39.7,12.34) C107.1 ; v1(39.7,12.34) 39.36,12.01 ; 34.47,38.61 C105.1 ; C105.1 35.05,37.95 ; C105.1 35.64,38.61 ; 11.53,47.78 C2.1 11.53,45.9 ; 5.35,40.29 D9.2 7.2,40.29 ; 13.73,45.62 C11.1 12.79,45.62 ; 32.79,12.81 v1(33.12,12.47) ; v1(33.12,12.47) 33.46,12.81 ; v1(33.12,12.47) BT2.2 ; C104.1 v1(36.73,15.06) ; C104.1 36.07,14.53 ; C104.1 35.6,15.06 ; v1(36.73,15.06) 37.06,15.4 ; v1(36.73,15.06) 37.06,14.73 ; C100.1 44.67,19.19 ; C100.1 44.14,18.72 ; C100.1 44.58,18.81 U13.19 ; C100.1 C101.1 44.44,17.58 v1(43.84,17.58) ; 43.5,17.91 v1(43.84,17.58) ; v1(43.84,17.58) 44.18,17.91 ; 16.26,35.38 v1(15.93,35.71) 15.59,35.38 ; J24.4 11.39,17.55 ; J24.4 9.64,17.55 ; J24.4 10.52,16.1 ; J24.4 10.52,19 ; v1(55.02,28.11) 55.35,27.77 ; v1(55.02,28.11) 55.35,28.44 ; v1(14.58,40) 14.92,39.67 ; v1(14.58,40) 14.24,40.34 ; v1(14.58,40) 14.92,40.34 ; R54.1 27.56,45.9 ; R54.1 27.09,46.34 ; 46.41,43.35 J25.4 ; J25.4 46.41,46.24 ; J25.4 47.28,44.79 ; J25.4 45.53,44.79 ; 27.54,14.33 SW2.2 ; SW2.2 v1(26.34,14.91) ; SW2.2 27.54,15.49 ; SW2.2 28.42,14.91 ; 62.38,28 v1(62.71,27.66) ; v1(62.71,27.66) 63.05,27.32 ; v1(62.71,27.66) 62.38,27.32 ; v1(62.71,27.66) 63.05,28 ; 8.99,35.64 C9.1 ; C9.1 8.05,36.58 ; C9.1 9.93,36.58 ; v1(16.79,17.35) 17.13,17.68 ; v1(16.79,17.35) 17.13,17.01 ; v1(16.79,17.35) 16.45,17.68 ; v1(16.79,17.35) 16.45,17.01 ; 33.12,9.85 BT2.2 ; BT2.2 32.59,11.02 ; BT2.2 33.65,11.02 ; SW4.1 48.38,16.96 49.23,16.12 49.64,16.12 50.06,15.69 ; SW4.1 47,16.96 ; SW4.1 48.03,16.29 ; U13.49 50.57,33.44 C89.1 51.73,33.13 52.55,33.96 C111.1 ; 19.15,28.55 v1(19.48,28.88) ; v1(19.48,28.88) 19.15,29.22 ; v1(19.48,28.88) 19.82,28.55 ; 22.12,32.94 v1(22.45,33.27) ; v1(22.45,33.27) 22.79,32.94 ; v1(22.45,33.27) C57.1 ; v1(22.45,33.27) 22.79,33.61 ; v1(22.45,33.27) 22.12,33.61 ; 26.8,43.86 C5.2 26.8,42.69 ; v1(35.97,41.38) 35.63,41.72 ; v1(35.97,41.38) 36.3,41.04 ; v1(35.97,41.38) 35.63,41.04 ; v1(35.97,41.38) 36.3,41.71 ; C4.2 24.77,43.86 ; C4.2 24.77,42.69 ; C4.2 24.11,43.27 ; C90.1 36.08,37.09 U13.74 ; 35.81,40.55 v1(36.14,40.22) ; v1(36.14,40.22) 35.81,39.88 ; v1(36.14,40.22) 36.52,40.59 36.79,40.59 37.07,40.31 U3.5 ; v1(36.14,40.22) 36.48,39.88 ; v1(25.81,36.42) 26.15,36.75 ; v1(25.81,36.42) 25.48,36.75 ; v1(25.81,36.42) 26.15,36.08 ; v1(25.81,36.42) 25.81,36.42 ; v1(25.81,36.42) 25.48,36.08 ; 24.77,35.83 C6.2 ; C6.2 24.77,37 ; C6.2 24.11,36.42 ; v1(26.34,14.91) 26.68,14.58 ; v1(26.34,14.91) 26,15.25 ; v1(26.34,14.91) 26.68,15.25 ; v1(26.34,14.91) 26,14.58 ; 11.53,39.04 C10.1 ; C10.1 10.59,39.98 ; C10.1 11.53,40.92 ; U3.5 36.79,40.06 ; U3.5 37.07,39.54 ; v1(14.58,46.86) 14.91,47.2 ; v1(14.58,46.86) 14.24,47.2 ; v1(14.58,46.86) 14.91,46.53 ; v1(14.58,46.86) 14.24,46.53 ; C111.1 52.63,34.62 52.76,34.75 C86.1 ; C108.1 v1(45.4,13) ; J10.4 11.39,24.16 ; J10.4 10.52,25.6 ; J10.4 9.64,24.16 ; C106.1 v1(38.28,15.06) ; v1(38.28,15.06) 37.94,14.73 ; v1(38.28,15.06) 37.94,15.4 ; C86.1 53.34,35.79 ; C86.1 52.76,36.53 v1(52.5,36.78) ; C86.1 52.17,35.79 ; v1(12.65,4.75) 12.99,5.09 ; v1(12.65,4.75) 12.99,4.41 ; v1(12.65,4.75) 12.31,4.41 ; U13.10 40.08,18.93 C87.1 v1(39.54,17.73) ; v1(39.5,40.22) 39.83,39.88 ; v1(39.5,40.22) 39.83,40.55 ; v1(39.5,40.22) 39.16,39.88 ; 31.85,30 v1(32.18,29.66) ; v1(32.18,29.66) 32.52,30 ; v1(32.18,29.66) 32.52,29.33 ; v1(32.18,29.66) 31.85,29.33 ; C57.1 22.9,32.54 ; C57.1 22.45,32.07 ; 39.2,17.39 v1(39.54,17.73) ; v1(39.54,17.73) 39.87,17.39 ; R82.1 18.06,17.32 18.14,17.32 ; R82.1 18.69,17.35 ; R82.1 18.03,17.93 ; 9.64,30.76 J20.4 ; J20.4 10.52,32.21 ; J20.4 11.39,30.76 ; J20.4 10.52,29.31 ; 9.33,38.11 v1(8.99,37.77) 8.66,38.11 ; R55.1 28.03,39.49 ; R55.1 27.09,39.49 ; 39.82,21.72 v1(40.15,21.38) 40.49,21.72 ; U8.8 21.35,25.15 21.58,24.92 U14.5 22.3,23.78 22.56,23.53 22.56,21.47 22.18,21.09 C55.2 ; C55.2 22.62,20.55 ; C55.2 22.18,20.08 ; 26.8,37 C7.2 26.8,35.83 ; 25.47,42.95 v1(25.81,43.28) ; v1(25.81,43.28) 26.14,43.62 ; v1(25.81,43.28) 25.47,43.62 ; C97.1 v1(35,18.62)
  TOP w0.381: C53.2 24.48,26.06 U8.2 23.16,26.22 U8.9 ; U10.9 23.16,29.93 U10.2 24.48,29.77 C56.2 ; U10.9 21.86,29.28 U10.8 ; U10.9 22.83,32.16 C57.1 ; U10.9 U8.9 ; U8.9 21.86,25.57 U8.8 ; 25.81,43.27 v1(25.81,43.28)
  TOP w0.508: R82.1 v1(16.79,17.35) ; v1(50.06,16.33) C110.1 ; D9.2 v1(6.27,39.27) ; C54.1 v1(19.48,28.88) ; C9.1 v1(8.99,37.77) ; U2.1 14.58,40 v1(14.58,40) ; v1(15.95,42.65) 16.17,42.87 R3.1 ; C53.2 v1(26.19,26.06) ; U1.1 v1(14.58,46.86) ; C56.2 v1(25.53,29.3) ; v1(15.93,35.71) 16.22,36.01 R5.1 ; C90.1 35.97,37.22 35.97,37.72 v1(35.78,37.91) 35.75,37.91 C105.1
  TOP w0.635: U2.1 13.72,39.23 C12.1 13.26,39.47 v1(12.75,39.98) C10.1 ; C6.2 C7.2 ; C4.2 C5.2 ; U1.1 13.72,46.09 C11.1 13.26,46.33 12.75,46.84 C2.1 C1.1
  GNDS w0.254: 53.41,34.3 v1(53.75,33.96) ; v1(53.75,33.96) 53.41,33.62 ; v1(53.75,33.96) 54.08,33.62 ; v1(53.75,33.96) 54.08,34.3 ; 34.66,18.28 v1(35,18.62) ; v1(35,18.62) 34.66,18.95 ; v1(35,18.62) 35.33,18.95 ; v1(35,18.62) 35.33,18.28 ; v1(28.22,46.34) 28.56,46.68 ; v1(28.22,46.34) 28.56,46.01 ; v1(28.22,46.34) 27.88,46.01 ; v1(28.22,46.34) 27.88,46.68 ; v1(25.53,29.3) 25.86,29.64 ; v1(25.53,29.3) 25.19,29.64 ; v1(25.53,29.3) 25.86,28.97 ; v1(25.53,29.3) 25.19,28.97 ; v1(36.73,15.06) 37.06,15.4 ; v1(36.73,15.06) 37.06,14.73 ; v1(36.73,15.06) 36.39,15.4 ; v1(36.73,15.06) 36.39,14.73 ; 34.72,39.36 v1(35.05,39.7) ; v1(35.05,39.7) 34.72,40.04 ; v1(35.05,39.7) 35.39,39.36 ; v1(35.05,39.7) 35.39,40.04 ; 52.17,37.12 v1(52.5,36.78) ; v1(52.5,36.78) 52.84,37.12 ; v1(52.5,36.78) 52.84,36.44 ; v1(52.5,36.78) 52.17,36.44 ; 25.47,43.62 v1(25.81,43.28) ; v1(25.81,43.28) 26.14,43.62 ; v1(25.81,43.28) 25.47,42.95 ; v1(25.81,43.28) 26.14,42.95 ; v1(14.58,46.86) 14.91,46.53 ; v1(14.58,46.86) 14.24,47.2 ; v1(14.58,46.86) 14.24,46.53 ; v1(14.58,46.86) 14.91,47.2 ; v1(15.93,35.71) 16.26,35.38 ; v1(15.93,35.71) 16.26,36.05 ; v1(15.93,35.71) 15.59,35.38 ; v1(15.93,35.71) 15.59,36.05 ; 43.25,21.74 v1(43.59,22.07) ; v1(43.59,22.07) 43.92,21.74 ; v1(43.59,22.07) 43.92,22.41 ; v1(33.44,41.59) 33.77,41.26 ; v1(33.44,41.59) 33.1,41.93 ; v1(33.44,41.59) 33.77,41.93 ; v1(33.44,41.59) 33.1,41.26 ; v1(22.45,33.27) 22.79,33.61 ; v1(22.45,33.27) 22.12,33.61 ; v1(22.45,33.27) 22.79,32.94 ; v1(22.45,33.27) 22.12,32.94 ; 17.06,7.5 v1(17.4,7.16) ; v1(17.4,7.16) 17.06,6.83 ; v1(17.4,7.16) 17.74,6.83 ; v1(19.48,28.88) 19.82,28.55 ; v1(19.48,28.88) 19.82,29.22 ; v1(19.48,28.88) 19.15,28.55 ; v1(19.48,28.88) 19.15,29.22 ; 35.63,41.71 v1(35.97,41.38) ; v1(35.97,41.38) 36.3,41.04 ; v1(35.97,41.38) 35.63,41.04 ; v1(35.97,41.38) 36.3,41.71 ; 35.44,37.57 v1(35.78,37.91) ; v1(35.78,37.91) 36.11,38.24 ; v1(35.78,37.91) 36.11,37.57 ; v1(35.78,37.91) 35.44,38.24 ; 31.85,30 v1(32.18,29.66) ; v1(32.18,29.66) 32.52,29.33 ; v1(32.18,29.66) 31.85,29.33 ; v1(32.18,29.66) 32.52,30 ; 39.16,40.55 v1(39.5,40.22) ; v1(39.5,40.22) 39.16,39.88 ; v1(39.5,40.22) 39.83,39.88 ; v1(39.5,40.22) 39.83,40.55 ; J19.6 61.37,32.47 ; J19.6 62.43,31.6 ; J19.6 60.3,31.6 ; J19.6 61.37,30.72 ; v1(6.27,39.27) 6.61,39.6 ; v1(6.27,39.27) 5.94,39.6 ; v1(6.27,39.27) 5.94,38.93 ; v1(6.27,39.27) 6.61,38.93 ; v1(26.19,26.06) 26.52,25.72 ; v1(26.19,26.06) 26.52,26.39 ; v1(26.19,26.06) 25.85,25.72 ; v1(26.19,26.06) 25.85,26.39 ; v1(62.71,27.66) 63.05,27.32 ; v1(62.71,27.66) 63.05,28 ; v1(62.71,27.66) 62.38,27.32 ; v1(62.71,27.66) 62.38,28 ; v1(45.4,13) 45.74,13.34 ; v1(45.4,13) 45.74,12.67 ; v1(45.4,13) 45.07,13.34 ; v1(45.4,13) 45.07,12.67 ; v1(43.84,17.58) 44.18,17.24 ; v1(43.84,17.58) 43.5,17.91 ; v1(43.84,17.58) 43.5,17.24 ; v1(43.84,17.58) 44.18,17.91 ; v1(12.75,39.98) 13.09,39.64 ; v1(12.75,39.98) 12.42,39.64 ; v1(12.75,39.98) 13.09,40.32 ; v1(12.75,39.98) 12.42,40.32 ; 35.81,40.55 v1(36.14,40.22) ; v1(36.14,40.22) 36.48,40.55 ; v1(36.14,40.22) 35.81,39.88 ; v1(36.14,40.22) 36.48,39.88 ; v1(38.28,15.06) 38.61,15.4 ; v1(38.28,15.06) 37.94,15.4 ; v1(38.28,15.06) 37.94,14.73 ; v1(38.28,15.06) 38.61,14.73 ; 25.48,36.75 v1(25.81,36.42) ; v1(25.81,36.42) 26.15,36.75 ; v1(25.81,36.42) 26.15,36.08 ; v1(25.81,36.42) 25.48,36.08 ; J25.4 46.41,46.24 ; J25.4 45.53,44.79 ; J25.4 47.28,44.79 ; J25.4 46.41,43.35 ; v1(15.95,42.65) 16.29,42.98 ; v1(15.95,42.65) 15.62,42.31 ; v1(15.95,42.65) 15.62,42.98 ; v1(15.95,42.65) 16.29,42.31 ; 38.91,1.63 J2.8 ; J2.8 41.05,1.63 ; J2.8 39.98,0.75 ; J2.8 39.98,2.5 ; 9.64,30.76 J20.4 ; J20.4 10.52,29.31 ; J20.4 11.39,30.76 ; J20.4 10.52,32.21 ; v1(33.12,12.47) 33.46,12.81 ; v1(33.12,12.47) 32.79,12.81 ; v1(33.12,12.47) 33.46,12.14 ; v1(33.12,12.47) 32.79,12.14 ; 27.38,38.7 v1(27.71,39.04) ; v1(27.71,39.04) 27.38,39.38 ; v1(27.71,39.04) 28.05,39.38 ; v1(27.71,39.04) 28.05,38.7 ; v1(50.06,16.33) 50.4,16.67 ; v1(50.06,16.33) 49.73,16.67 ; v1(50.06,16.33) 49.73,16 ; v1(50.06,16.33) 50.4,16 ; 31.34,22.62 v1(31.67,22.29) 32.01,22.62 ; v1(8.99,37.77) 9.33,38.11 ; v1(8.99,37.77) 9.33,37.43 ; v1(8.99,37.77) 8.66,38.11 ; v1(8.99,37.77) 8.66,37.43 ; 26,15.25 v1(26.34,14.91) ; v1(26.34,14.91) 26.68,14.58 ; v1(26.34,14.91) 26.68,15.25 ; v1(26.34,14.91) 26,14.58 ; 39.82,21.72 v1(40.15,21.38) ; v1(40.15,21.38) 40.49,21.05 ; v1(40.15,21.38) 40.49,21.72 ; v1(40.15,21.38) 39.82,21.05 ; v1(19,4.75) 19.34,4.41 ; v1(19,4.75) 18.66,4.41 ; v1(19,4.75) 19.34,5.09 ; v1(19,4.75) 18.66,5.09 ; 14.24,39.67 v1(14.58,40) ; v1(14.58,40) 14.92,39.67 ; v1(14.58,40) 14.24,40.34 ; v1(14.58,40) 14.92,40.34 ; 39.2,17.39 v1(39.54,17.73) ; v1(39.54,17.73) 39.2,18.07 ; v1(39.54,17.73) 39.87,18.07 ; v1(39.54,17.73) 39.87,17.39 ; J10.4 11.39,24.16 ; J10.4 10.52,25.6 ; J10.4 10.52,22.71 ; J10.4 9.64,24.16 ; v1(55.02,28.11) 55.35,27.77 ; v1(55.02,28.11) 54.68,27.77 ; v1(55.02,28.11) 54.68,28.44 ; v1(55.02,28.11) 55.35,28.44 ; 10.52,16.1 J24.4 ; J24.4 10.52,19 ; J24.4 9.64,17.55 ; J24.4 11.39,17.55 ; v1(16.79,17.35) 17.13,17.01 ; v1(16.79,17.35) 16.45,17.01 ; v1(16.79,17.35) 17.13,17.68 ; v1(16.79,17.35) 16.45,17.68 ; v1(39.7,12.34) 40.03,12.68 ; v1(39.7,12.34) 40.03,12.01 ; v1(39.7,12.34) 39.36,12.68 ; v1(39.7,12.34) 39.36,12.01 ; v1(12.65,4.75) 12.99,5.09 ; v1(12.65,4.75) 12.31,4.41 ; v1(12.65,4.75) 12.99,4.41 ; 51.35,21.41 v1(51.69,21.74) 52.03,21.41
  BOTTOM w0.254: v1(25.53,29.3) 25.86,28.97 ; v1(25.53,29.3) 25.19,28.97 ; v1(25.53,29.3) 25.19,29.64 ; v1(35.05,39.7) 35.39,39.36 ; v1(35.05,39.7) 34.72,39.36 ; v1(35.05,39.7) 35.39,40.04 ; v1(35.05,39.7) 34.72,40.04 ; J24.4 11.39,17.55 ; J24.4 10.52,16.1 ; J24.4 9.64,17.55 ; J24.4 10.52,19 ; 46.41,43.35 J25.4 ; J25.4 46.41,46.24 ; J25.4 47.28,44.79 ; J25.4 45.53,44.79 ; v1(35.78,37.91) 36.11,38.24 ; v1(35.78,37.91) 36.11,37.57 ; v1(35.78,37.91) 35.44,37.57 ; v1(35.78,37.91) 35.44,38.24 ; 18.34,3.82 C25.1 ; C25.1 18.31,4.26 ; C25.1 18.81,4.26 ; v1(55.02,28.11) 55.35,28.44 ; v1(55.02,28.11) 54.68,28.44 ; v1(55.02,28.11) 54.68,27.77 ; v1(55.02,28.11) 55.35,27.77 ; v1(28.22,46.34) 28.56,46.01 ; v1(28.22,46.34) 27.88,46.01 ; v1(28.22,46.34) 27.88,46.68 ; v1(28.22,46.34) 28.56,46.68 ; 62.38,28 v1(62.71,27.66) ; v1(62.71,27.66) 63.05,27.32 ; v1(62.71,27.66) 63.05,28 ; v1(62.71,27.66) 62.38,27.32 ; v1(62.71,27.66) R79.2 ; v1(35.97,41.38) 36.3,41.04 ; v1(35.97,41.38) 35.63,41.04 ; v1(35.97,41.38) 36.3,41.71 ; v1(35.97,41.38) 35.63,41.71 ; 33.21,32.09 J26.S4 ; J26.S4 34.37,32.09 ; J26.S4 33.79,31.13 33.39,30.73 J26.SW-A ; 45.07,12.67 v1(45.4,13) ; v1(45.4,13) 45.07,13.34 ; v1(45.4,13) 45.74,12.67 ; v1(45.4,13) 45.74,13.34 ; 16.45,17.68 v1(16.79,17.35) ; v1(16.79,17.35) 17.13,17.68 ; v1(16.79,17.35) 17.13,17.01 ; v1(16.79,17.35) 16.45,17.01 ; 17.61,4.41 16.8,3.6 ; 16.8,3.6 16.8,4.38 ; 16.8,3.6 Y2.4 ; 10.52,22.71 J10.4 ; J10.4 10.52,25.6 ; J10.4 9.64,24.16 ; J10.4 11.39,24.16 ; 14.24,47.2 v1(14.58,46.86) ; v1(14.58,46.86) 14.91,46.53 ; v1(14.58,46.86) 14.24,46.53 ; v1(14.58,46.86) 14.91,47.2 ; 25.85,26.39 v1(26.19,26.06) ; v1(26.19,26.06) 25.85,25.72 ; v1(26.19,26.06) 26.52,26.39 ; U4.8 17.32,8.08 C14.1 17.12,7.44 v1(17.4,7.16) 17.74,6.83 ; 52.17,36.44 v1(52.5,36.78) ; v1(52.5,36.78) 52.17,37.12 ; v1(52.5,36.78) 52.84,37.12 ; v1(52.5,36.78) 52.84,36.44 ; v1(36.14,40.22) 36.48,40.55 ; v1(36.14,40.22) 35.81,39.88 ; v1(36.14,40.22) 36.48,39.88 ; v1(36.14,40.22) 35.81,40.55 ; v1(15.95,42.65) 16.29,42.98 ; v1(15.95,42.65) 16.29,42.31 ; v1(15.95,42.65) 15.62,42.98 ; v1(15.95,42.65) 15.62,42.31 ; 18.31,4.26 18.8,4.75 v1(19,4.75) ; 18.31,4.26 17.97,4.61 ; 13.48,6 Y2.2 ; 12.31,4.41 v1(12.65,4.75) 12.71,4.82 12.71,5.23 C28.1 ; J20.4 11.39,30.76 ; J20.4 10.52,32.21 ; J20.4 9.64,30.76 ; J20.4 10.52,29.31 ; 33.39,28.71 J26.SW-A ; J26.SW-A v1(32.18,29.66) ; J26.SW-A 34.07,29.66 ; v1(19,4.75) 19.34,5.09 ; v1(19,4.75) 19.34,4.41 ; 25.49,41.66 26.04,42.21 C103.1 C102.1 25.96,43.13 v1(25.81,43.28) ; 25.49,41.66 25.3,41.85 22.34,41.85 22.09,41.59 J26.S1 22.09,39.33 21.84,39.08 J26.S3 22.37,33.27 v1(22.45,33.27) 22.79,32.94 ; 25.49,41.66 J26.6 ; v1(8.99,37.77) 9.33,37.43 ; v1(8.99,37.77) 8.66,38.11 ; v1(8.99,37.77) 9.33,38.11 ; v1(8.99,37.77) 8.66,37.43 ; 32.51,40.34 J26.S2 ; J26.S2 33.44,39.41 ; J26.S2 34.37,40.34 ; J26.S2 v1(33.44,41.59) ; v1(25.81,36.42) 26.15,36.75 ; v1(25.81,36.42) 25.48,36.08 ; v1(25.81,36.42) 26.15,36.08 ; v1(25.81,36.42) 25.48,36.75 ; J19.6 61.37,32.47 ; J19.6 60.3,31.6 ; J19.6 61.37,30.72 ; J19.6 62.43,31.6 ; v1(43.59,22.07) 43.59,21.89 43.83,21.65 C113.1 ; 34.66,18.95 v1(35,18.62) ; v1(35,18.62) 35.33,18.28 ; v1(35,18.62) 35.33,18.95 ; v1(35,18.62) 34.66,18.28 ; v1(32.18,29.66) 32.52,30 ; v1(32.18,29.66) 31.85,30 ; v1(32.18,29.66) 32.52,29.33 ; v1(32.18,29.66) 31.85,29.33 ; v1(39.54,17.73) 39.87,17.39 ; v1(39.54,17.73) 39.2,18.07 ; v1(39.54,17.73) 39.2,17.39 ; v1(39.54,17.73) 39.87,18.07 ; C28.1 13.73,5.23 ; C28.1 13.26,5.68 ; 53.41,34.3 v1(53.75,33.96) ; v1(53.75,33.96) 54.08,34.3 ; v1(53.75,33.96) 54.08,33.62 ; v1(53.75,33.96) 53.41,33.62 ; 33.1,41.93 v1(33.44,41.59) ; v1(33.44,41.59) 33.77,41.93 ; v1(33.44,41.59) 33.1,41.26 ; v1(33.44,41.59) 33.77,41.26 ; v1(14.58,40) 14.92,40.34 ; v1(14.58,40) 14.92,39.67 ; v1(14.58,40) 14.24,39.67 ; v1(14.58,40) 14.24,40.34 ; 19.15,29.22 v1(19.48,28.88) ; v1(19.48,28.88) 19.82,29.22 ; v1(19.48,28.88) 19.82,28.55 ; v1(19.48,28.88) 19.15,28.55 ; 36.39,14.73 v1(36.73,15.06) ; v1(36.73,15.06) 37.06,14.73 ; v1(36.73,15.06) 36.39,15.4 ; v1(36.73,15.06) 37.06,15.4 ; J2.8 41.05,1.63 ; J2.8 39.98,2.5 ; J2.8 38.91,1.63 ; J2.8 39.98,0.75 ; v1(33.12,12.47) 33.46,12.81 ; v1(33.12,12.47) 32.79,12.81 ; v1(33.12,12.47) 33.46,12.14 ; v1(33.12,12.47) 32.79,12.14 ; 62.05,26.67 R79.2 ; R79.2 63.37,26.67 ; v1(39.5,40.22) 39.83,39.88 ; v1(39.5,40.22) 39.16,39.88 ; v1(39.5,40.22) 39.83,40.55 ; v1(39.5,40.22) 39.16,40.55 ; v1(12.75,39.98) 13.09,40.32 ; v1(12.75,39.98) 12.42,40.32 ; v1(12.75,39.98) 12.42,39.64 ; v1(12.75,39.98) 13.09,39.64 ; 16.02,3.5 Y2.4 ; Y2.4 16.8,2.62 ; Y2.4 17.58,3.5 ; 5.94,39.6 v1(6.27,39.27) ; v1(6.27,39.27) 6.61,39.6 ; v1(6.27,39.27) 5.94,38.93 ; v1(6.27,39.27) 6.61,38.93 ; BT1.2 40.86,22.56 ; BT1.2 40.86,20.21 ; BT1.2 v1(40.15,21.38) ; v1(25.81,43.28) 25.47,43.62 ; v1(25.81,43.28) 26.14,43.62 ; v1(25.81,43.28) 25.47,42.95 ; 39.36,12.68 v1(39.7,12.34) ; v1(39.7,12.34) 40.03,12.01 ; v1(39.7,12.34) 40.03,12.68 ; v1(39.7,12.34) 39.36,12.01 ; 37.94,14.73 v1(38.28,15.06) ; v1(38.28,15.06) 38.61,15.4 ; v1(38.28,15.06) 37.94,15.4 ; v1(38.28,15.06) 38.61,14.73 ; 26,14.58 v1(26.34,14.91) ; v1(26.34,14.91) 26,15.25 ; v1(26.34,14.91) 26.68,15.25 ; v1(26.34,14.91) 26.68,14.58 ; 50.4,16 v1(50.06,16.33) 50.4,16.67 ; 31.34,22.62 v1(31.67,22.29) 32.01,22.62 ; v1(15.93,35.71) 16.26,36.05 ; v1(15.93,35.71) 15.59,36.05 ; v1(15.93,35.71) 15.59,35.38 ; v1(15.93,35.71) 16.26,35.38 ; 52.03,21.41 v1(51.69,21.74) 51.35,21.41
  vias: v1(1.4,47.12) v1(1.4,44.58) v1(1.4,24.26) v1(1.4,21.72) v1(2.67,45.85) v1(2.67,40.77) v1(2.67,28.07) v1(2.67,20.45) v1(3.94,47.12) v1(3.94,44.58) v1(3.94,34.42) v1(3.94,26.8) v1(3.94,21.72) v1(5.21,45.85) v1(5.21,40.77) v1(5.21,38.23) v1(5.21,28.07) v1(5.21,20.45) v1(6.48,47.12) v1(6.48,44.58) v1(6.48,36.96) v1(6.48,34.42) v1(6.48,26.8) v1(7.75,45.85) v1(7.75,43.31) v1(7.75,40.77) v1(7.75,38.23) v1(7.75,35.69) v1(7.75,33.15) v1(9.02,34.42) v1(9.02,26.8) v1(10.29,45.85) v1(10.29,40.77) v1(10.29,35.69) v1(10.29,33.15) v1(11.56,34.42) v1(11.56,29.34) v1(11.56,26.8) v1(11.56,19.18) v1(12.83,45.85) v1(12.83,40.77) v1(12.83,35.69) v1(12.83,33.15) v1(12.83,30.61) v1(12.83,25.53) v1(12.83,22.99) v1(12.83,17.91) v1(14.1,34.42) v1(14.1,31.88) v1(14.1,29.34) v1(14.1,26.8) v1(14.1,24.26) v1(14.1,19.18) v1(14.1,1.4) v1(15.37,40.77) v1(15.37,33.15) v1(15.37,30.61) v1(15.37,25.53) v1(15.37,17.91) v1(16.64,34.42) v1(16.64,31.88) v1(16.64,26.8) v1(16.64,21.72) v1(16.64,19.18) v1(16.64,1.4) v1(17.91,33.15) v1(17.91,28.07) v1(17.91,22.99) v1(19.18,34.42) v1(19.18,31.88) v1(19.18,24.26) v1(19.18,19.18) v1(19.18,6.48) v1(19.18,1.4) v1(20.45,38.23) v1(20.45,20.45) v1(20.45,17.91) v1(20.45,7.75) v1(20.45,5.21) v1(20.45,2.67) v1(21.72,34.42) v1(21.72,29.34) v1(21.72,24.26) v1(21.72,16.64) v1(21.72,14.1) v1(21.72,1.4) v1(22.99,38.23) v1(22.99,28.07) v1(22.99,25.53) v1(22.99,20.45) v1(22.99,17.91) v1(22.99,15.37) v1(22.99,12.83) v1(24.26,19.18) v1(24.26,16.64) v1(24.26,14.1) v1(24.26,1.4) v1(25.53,45.85) v1(25.53,20.45) v1(25.53,17.91) v1(25.53,15.37) v1(25.53,12.83) v1(26.8,24.26) v1(26.8,16.64) v1(26.8,14.1) v1(26.8,3.94) v1(26.8,1.4) v1(28.07,20.45) v1(28.07,15.37) v1(28.07,12.83) v1(28.07,2.67) v1(29.34,47.12) v1(29.34,42.04) v1(29.34,24.26) v1(29.34,19.18) v1(29.34,16.64) v1(29.34,14.1) v1(29.34,11.56) v1(29.34,1.4) v1(30.61,45.85) v1(30.61,43.31) v1(30.61,30.61) v1(30.61,17.91) v1(30.61,15.37) v1(30.61,12.83) v1(30.61,10.29) v1(31.88,47.12) v1(31.88,42.04) v1(31.88,14.1) v1(32.59,43.41) v1(33.15,15.37) v1(33.15,10.29) v1(34.21,47.83) v1(34.42,42.04) v1(34.42,14.1) v1(34.42,11.56) v1(35.69,45.85) v1(35.69,43.31) v1(35.69,25.53) v1(35.69,22.99) v1(35.69,12.83) v1(36.96,47.12) v1(36.96,39.5) v1(36.96,29.34) v1(36.96,24.26) v1(36.96,21.72) v1(36.96,14.1) v1(38.02,46.66) v1(38.23,25.53) v1(38.23,22.99) v1(38.23,12.83) v1(39.5,47.12) v1(39.5,42.04) v1(39.5,39.5) v1(39.5,36.96) v1(39.5,26.8) v1(39.5,24.26) v1(39.5,16.64) v1(40.77,38.23) v1(40.77,28.07) v1(40.77,25.53) v1(40.77,12.83) v1(42.06,47.88) v1(42.04,36.96) v1(42.04,29.34) v1(42.04,26.8) v1(42.04,14.1) v1(42.04,3.94) v1(42.04,1.4) v1(43.31,45.85) v1(43.31,38.23) v1(43.31,7.75) v1(43.31,2.67) v1(44.58,47.12) v1(44.58,44.58) v1(44.58,39.5) v1(44.58,31.88) v1(44.58,29.34) v1(44.58,3.94) v1(44.58,1.4) v1(45.85,40.77) v1(45.85,7.75) v1(45.85,2.67) v1(47.12,47.12) v1(47.12,39.5) v1(47.12,31.88) v1(47.12,29.34) v1(47.12,26.8) v1(47.12,3.94) v1(47.12,1.4) v1(48.39,40.77) v1(48.39,15.37) v1(48.39,5.21) v1(48.39,2.67) v1(49.66,47.12) v1(49.66,39.5) v1(49.66,1.4) v1(50.93,40.77) v1(50.93,20.45) v1(50.93,7.75) v1(52.2,47.12) v1(52.2,42.04) v1(52.2,39.5) v1(52.2,19.18) v1(52.2,9.02) v1(52.2,1.4) v1(53.47,40.77) v1(53.47,28.07) v1(53.47,10.29) v1(53.47,7.75) v1(54.74,47.12) v1(54.74,42.04) v1(54.74,39.5) v1(54.74,29.34) v1(54.74,11.56) v1(54.74,9.02) v1(54.74,6.48) v1(54.74,3.94) v1(54.74,1.4) v1(56.01,45.85) v1(56.01,43.31) v1(56.01,40.77) v1(56.01,38.23) v1(57.28,47.12) v1(57.28,44.58) v1(57.28,42.04) v1(57.28,39.5) v1(57.28,29.34) v1(58.55,45.85) v1(58.55,40.77) v1(58.55,38.23) v1(58.55,28.07) v1(59.82,47.12) v1(59.82,39.5) v1(59.82,29.34) v1(61.09,38.23) v1(61.09,28.07) v1(62.36,47.12) v1(62.36,39.5) v1(62.36,29.34) v1(63.63,45.85) v1(63.63,43.31) v1(63.63,40.77) v1(63.63,38.23) v1(63.63,35.69) v1(63.63,33.15) v1(63.63,30.61) v1(63.63,28.07) v1(64.9,47.12) v1(64.9,44.58) v1(64.9,42.04) v1(64.9,39.5) v1(64.9,36.96) v1(64.9,31.88) v1(64.9,29.34) v1(64.92,34.39)
GND_GPS: length 246.8
  TOP w0.254: 63.88,19.51 v1(64.21,19.18) ; v1(64.21,19.18) 64.55,18.84 ; v1(64.21,19.18) 63.88,18.84 ; v1(64.21,19.18) 64.55,19.51 ; v1(62.2,6.65) 62.63,6.23 ; v1(62.2,6.65) 62.63,7.08 ; v1(62.2,6.65) 61.78,7.08 ; v1(62.2,6.65) 61.78,6.23 ; 60.83,2.75 v1(61.16,2.41) ; v1(61.16,2.41) 61.5,2.08 ; v1(61.16,2.41) 60.83,2.08 ; v1(64.21,16.13) 64.55,16.47 ; v1(64.21,16.13) 63.88,16.47 ; v1(64.21,16.13) 64.55,15.79 ; v1(64.21,16.13) 63.88,15.79 ; v1(59.64,8.51) 59.98,8.85 ; v1(59.64,8.51) 59.3,8.85 ; v1(59.64,8.51) 59.3,8.17 ; v1(59.64,8.51) 59.98,8.17 ; v1(64.21,8.51) 64.55,8.17 ; v1(64.21,8.51) 63.88,8.17 ; v1(64.21,8.51) 64.55,8.85 ; 58.93,0.51 J22.5 ; J22.5 57.66,1.78 ; J22.5 60.2,1.78 ; J22.5 58.93,3.05 ; 63.88,23.41 v1(64.21,23.75) ; v1(64.21,23.75) 64.55,24.09 ; v1(64.21,23.75) 64.55,23.41 ; v1(64.21,23.75) 63.88,24.09 ; 62.38,24.47 v1(62.71,24.13) ; v1(62.71,24.13) 63.05,24.47 ; v1(62.71,24.13) 62.38,23.79 ; v1(62.71,24.13) 63.05,23.79 ; 57.78,16.47 v1(58.12,16.13) ; v1(58.12,16.13) 57.78,15.79 ; v1(58.12,16.13) 58.45,16.47 ; v1(58.12,16.13) 58.45,15.79 ; v1(58.06,16.97) 58.4,16.63 ; v1(58.06,16.97) 57.73,17.3 ; v1(58.06,16.97) 57.73,16.63 ; v1(58.06,16.97) 58.4,17.3 ; 63.88,3.6 v1(64.21,3.94) ; v1(64.21,3.94) 64.55,3.6 ; v1(64.21,3.94) 63.88,4.27 ; v1(64.21,3.94) 64.55,4.27 ; 57.78,3.6 v1(58.12,3.94) ; v1(58.12,3.94) 57.78,4.27 ; v1(58.12,3.94) 58.45,3.6 ; v1(58.12,3.94) 58.45,4.27 ; J22.2 58.93,8.13 ; J22.2 57.66,6.86 ; J22.2 58.93,5.59 ; J22.2 60.2,6.86 ; v1(60.4,7.75) 60.74,7.41 ; v1(60.4,7.75) 60.07,8.08 ; v1(60.4,7.75) 60.74,8.08 ; v1(60.4,7.75) 60.07,7.41 ; 63.88,22.56 v1(64.21,22.23) ; v1(64.21,22.23) 63.88,21.89 ; v1(64.21,22.23) 64.55,22.56 ; v1(64.21,22.23) 64.55,21.89 ; 57.78,8.85 v1(58.12,8.51) ; v1(58.12,8.51) 58.45,8.85 ; v1(58.12,8.51) 58.45,8.17 ; v1(58.12,8.51) 57.78,8.17 ; v1(58.88,4.7) 59.21,5.04 ; v1(58.88,4.7) 59.21,4.36 ; v1(58.88,4.7) 58.54,4.36 ; v1(58.88,4.7) 58.54,5.04 ; 63.11,5.04 v1(63.45,4.7) ; v1(63.45,4.7) 63.79,5.04 ; v1(63.45,4.7) 63.79,4.36 ; v1(63.45,4.7) 63.11,4.36 ; 64.55,12.75 v1(64.21,13.08) 64.55,13.42 ; v1(64.21,20.7) 64.55,20.37 ; v1(64.21,20.7) 63.88,21.04 ; v1(64.21,20.7) 63.88,20.37 ; v1(64.21,20.7) 64.55,21.04 ; 57.73,12.1 v1(58.06,11.77) ; v1(58.06,11.77) 58.4,11.43 ; v1(58.06,11.77) 58.4,12.1 ; v1(58.06,11.77) 57.73,11.43 ; v1(61.16,0.89) 61.5,1.23 ; v1(61.16,0.89) 61.5,0.55 ; v1(61.16,0.89) 60.83,1.23 ; v1(61.16,0.89) 60.83,0.55 ; 61.59,1.99 v1(61.93,1.65) ; v1(61.93,1.65) 62.26,1.99 ; v1(61.93,1.65) 62.26,1.32 ; v1(61.93,1.65) 61.59,1.32 ; 63.11,18.75 v1(63.45,18.42) ; v1(63.45,18.42) 63.79,18.08 ; v1(63.45,18.42) 63.79,18.75 ; v1(63.45,18.42) 63.11,18.08 ; 59.3,15.79 v1(59.64,16.13) ; v1(59.64,16.13) 59.98,16.47 ; v1(59.64,16.13) 59.3,16.47 ; v1(59.64,16.13) 59.98,15.79 ; 63.11,16.56 v1(63.45,16.89) ; v1(63.45,16.89) 63.79,16.56 ; v1(63.45,16.89) 63.11,17.23 ; v1(63.45,16.89) 63.79,17.23 ; J22.3 65.28,6.86 ; J22.3 62.74,6.86 ; J22.3 64.01,5.59 ; v1(62.28,8.08) 62.71,7.65 ; v1(62.28,8.08) 61.86,8.5 ; v1(62.28,8.08) 61.86,7.65 ; v1(62.28,8.08) 62.71,8.5 ; 63.88,17.32 v1(64.21,17.65) ; v1(64.21,17.65) 64.55,17.99 ; v1(64.21,17.65) 63.88,17.99 ; v1(64.21,17.65) 64.55,17.32 ; v1(58.88,24.51) 59.21,24.85 ; v1(58.88,24.51) 59.21,24.18 ; v1(58.88,24.51) 58.54,24.85 ; v1(58.88,24.51) 58.54,24.18 ; J22.4 65.28,1.78 ; J22.4 64.01,0.51 ; J22.4 62.74,1.78 ; J22.4 64.01,3.05 ; 64.55,11.22 v1(64.21,11.56) 64.55,11.89 ; v1(64.21,14.61) 64.55,14.94 ; v1(64.21,14.61) 63.88,14.94 ; v1(64.21,14.61) 64.55,14.27 ; v1(63.45,22.99) 63.79,23.32 ; v1(63.45,22.99) 63.11,23.32 ; v1(63.45,22.99) 63.79,22.65 ; v1(60.4,6.22) 60.74,5.89 ; v1(60.4,6.22) 60.07,5.89 ; v1(60.4,6.22) 60.74,6.56 ; v1(58.88,15.37) 59.21,15.7 ; v1(58.88,15.37) 59.21,15.03 ; v1(58.88,15.37) 58.54,15.7 ; v1(58.88,15.37) 58.54,15.03
  GNDS w0.254: v1(58.12,16.13) 58.45,15.79 ; v1(58.12,16.13) 57.78,16.47 ; v1(58.12,16.13) 58.45,16.47 ; v1(58.12,16.13) 57.78,15.79 ; 62.38,23.79 v1(62.71,24.13) ; v1(62.71,24.13) 63.05,23.79 ; v1(62.71,24.13) 63.05,24.47 ; v1(62.71,24.13) 62.38,24.47 ; v1(58.88,15.37) 59.21,15.03 ; v1(58.88,15.37) 58.54,15.7 ; v1(58.88,15.37) 59.21,15.7 ; v1(58.88,15.37) 58.54,15.03 ; 57.78,3.6 v1(58.12,3.94) ; v1(58.12,3.94) 58.45,4.27 ; v1(58.12,3.94) 57.78,4.27 ; v1(58.12,3.94) 58.45,3.6 ; v1(58.06,16.97) 58.4,16.63 ; v1(58.06,16.97) 57.73,16.63 ; v1(58.06,16.97) 57.73,17.3 ; v1(58.06,16.97) 58.4,17.3 ; J22.2 60.2,6.86 ; J22.2 57.66,6.86 ; J22.2 58.93,8.13 ; J22.2 58.93,5.59 ; v1(64.21,14.61) 64.55,14.94 ; v1(64.21,14.61) 63.88,14.27 ; v1(64.21,14.61) 63.88,14.94 ; v1(64.21,14.61) 64.55,14.27 ; v1(64.21,8.51) 64.55,8.85 ; v1(64.21,8.51) 63.88,8.17 ; v1(64.21,8.51) 63.88,8.85 ; v1(64.21,8.51) 64.55,8.17 ; 63.11,17.23 v1(63.45,16.89) ; v1(63.45,16.89) 63.11,16.56 ; v1(63.45,16.89) 63.79,17.23 ; v1(63.45,16.89) 63.79,16.56 ; 60.07,8.08 v1(60.4,7.75) ; v1(60.4,7.75) 60.74,7.41 ; v1(60.4,7.75) 60.07,7.41 ; v1(60.4,7.75) 60.74,8.08 ; 63.88,15.79 v1(64.21,16.13) ; v1(64.21,16.13) 64.55,16.47 ; v1(64.21,16.13) 63.88,16.47 ; v1(64.21,16.13) 64.55,15.79 ; 57.66,1.78 J22.5 ; J22.5 58.93,3.05 ; J22.5 60.2,1.78 ; J22.5 58.93,0.51 ; v1(64.21,22.23) 64.55,22.56 ; v1(64.21,22.23) 63.88,22.56 ; v1(64.21,22.23) 64.55,21.89 ; v1(64.21,22.23) 63.88,21.89 ; 63.88,24.09 v1(64.21,23.75) ; v1(64.21,23.75) 64.55,24.09 ; v1(64.21,23.75) 64.55,23.41 ; v1(64.21,23.75) 63.88,23.41 ; 61.87,6.99 v1(62.2,6.65) ; v1(62.2,6.65) 62.54,6.32 ; v1(62.2,6.65) 62.54,6.99 ; v1(62.2,6.65) 61.87,6.32 ; 63.11,18.75 v1(63.45,18.42) ; v1(63.45,18.42) 63.11,18.08 ; v1(63.45,18.42) 63.79,18.75 ; v1(63.45,18.42) 63.79,18.08 ; 57.73,12.1 v1(58.06,11.77) ; v1(58.06,11.77) 57.73,11.43 ; v1(58.06,11.77) 58.4,12.1 ; v1(58.06,11.77) 58.4,11.43 ; 63.88,12.75 v1(64.21,13.08) ; v1(64.21,13.08) 64.55,13.42 ; v1(64.21,13.08) 64.55,12.75 ; v1(64.21,13.08) 63.88,13.42 ; 63.88,4.27 v1(64.21,3.94) ; v1(64.21,3.94) 63.88,3.6 ; v1(64.21,3.94) 64.55,4.27 ; v1(64.21,3.94) 64.55,3.6 ; v1(63.45,4.7) 63.79,5.04 ; v1(63.45,4.7) 63.11,5.04 ; v1(63.45,4.7) 63.11,4.36 ; v1(63.45,4.7) 63.79,4.36 ; v1(59.64,16.13) 59.98,15.79 ; v1(59.64,16.13) 59.3,15.79 ; v1(59.64,16.13) 59.98,16.47 ; v1(59.64,16.13) 59.3,16.47 ; v1(61.16,2.41) 61.5,2.08 ; v1(61.16,2.41) 60.83,2.75 ; v1(61.16,2.41) 60.83,2.08 ; 61.59,1.99 v1(61.93,1.65) ; v1(61.93,1.65) 62.26,1.32 ; v1(61.93,1.65) 61.59,1.32 ; v1(61.93,1.65) 62.26,1.99 ; 58.54,24.85 v1(58.88,24.51) ; v1(58.88,24.51) 59.21,24.85 ; v1(58.88,24.51) 59.21,24.18 ; v1(58.88,24.51) 58.54,24.18 ; v1(64.21,17.65) 64.55,17.32 ; v1(64.21,17.65) 63.88,17.99 ; v1(64.21,17.65) 63.88,17.32 ; v1(64.21,17.65) 64.55,17.99 ; v1(62.28,8.08) 62.62,7.74 ; v1(62.28,8.08) 62.62,8.41 ; v1(62.28,8.08) 61.94,7.74 ; v1(62.28,8.08) 61.94,8.41 ; 60.07,5.89 v1(60.4,6.22) ; v1(60.4,6.22) 60.74,6.56 ; v1(60.4,6.22) 60.74,5.89 ; 63.88,20.37 v1(64.21,20.7) ; v1(64.21,20.7) 64.55,21.04 ; v1(64.21,20.7) 63.88,21.04 ; v1(64.21,20.7) 64.55,20.37 ; 59.3,8.85 v1(59.64,8.51) ; v1(59.64,8.51) 59.98,8.85 ; v1(59.64,8.51) 59.3,8.17 ; v1(59.64,8.51) 59.98,8.17 ; 63.88,19.51 v1(64.21,19.18) ; v1(64.21,19.18) 63.88,18.84 ; v1(64.21,19.18) 64.55,19.51 ; v1(64.21,19.18) 64.55,18.84 ; v1(63.45,22.99) 63.79,23.32 ; v1(63.45,22.99) 63.11,22.65 ; v1(63.45,22.99) 63.11,23.32 ; v1(63.45,22.99) 63.79,22.65 ; 57.78,8.85 v1(58.12,8.51) ; v1(58.12,8.51) 58.45,8.85 ; v1(58.12,8.51) 57.78,8.17 ; v1(58.12,8.51) 58.45,8.17 ; 60.83,1.23 v1(61.16,0.89) ; v1(61.16,0.89) 61.5,0.55 ; v1(61.16,0.89) 60.83,0.55 ; v1(61.16,0.89) 61.5,1.23 ; v1(64.21,11.56) 64.55,11.22 ; v1(64.21,11.56) 63.88,11.22 ; v1(64.21,11.56) 64.55,11.89 ; v1(64.21,11.56) 63.88,11.89 ; J22.4 64.01,3.05 ; J22.4 64.01,0.51 ; J22.4 62.74,1.78 ; J22.4 65.28,1.78 ; 58.54,4.36 v1(58.88,4.7) ; v1(58.88,4.7) 59.21,4.36 ; v1(58.88,4.7) 59.21,5.04 ; v1(58.88,4.7) 58.54,5.04 ; J22.3 65.28,6.86 ; J22.3 62.74,6.86 ; J22.3 64.01,5.59
  BOTTOM w0.254: v1(62.28,8.08) 62.62,8.41 ; v1(62.28,8.08) 61.94,8.41 ; v1(62.28,8.08) 62.62,7.74 ; v1(62.28,8.08) 61.94,7.74 ; 63.11,23.32 v1(63.45,22.99) ; v1(63.45,22.99) 63.11,22.65 ; v1(63.45,22.99) 63.79,23.32 ; v1(63.45,22.99) 63.79,22.65 ; 63.88,24.09 v1(64.21,23.75) ; v1(64.21,23.75) 63.88,23.41 ; v1(64.21,23.75) 64.55,23.41 ; v1(64.21,23.75) 64.55,24.09 ; v1(64.21,16.13) 64.55,15.79 ; v1(64.21,16.13) 63.88,15.79 ; v1(64.21,16.13) 63.88,16.47 ; v1(64.21,16.13) 64.55,16.47 ; 63.88,18.84 v1(64.21,19.18) ; v1(64.21,19.18) 63.88,19.51 ; v1(64.21,19.18) 64.55,19.51 ; v1(64.21,19.18) 64.55,18.84 ; v1(64.21,17.65) 64.55,17.99 ; v1(64.21,17.65) 64.55,17.32 ; v1(64.21,17.65) 63.88,17.99 ; v1(64.21,17.65) 63.88,17.32 ; 63.88,20.37 v1(64.21,20.7) ; v1(64.21,20.7) 64.55,21.04 ; v1(64.21,20.7) 64.55,20.37 ; v1(64.21,20.7) 63.88,21.04 ; 63.88,21.89 v1(64.21,22.23) ; v1(64.21,22.23) 64.55,21.89 ; v1(64.21,22.23) 64.55,22.56 ; v1(64.21,22.23) 63.88,22.56 ; v1(64.21,3.94) 64.55,3.6 ; v1(64.21,3.94) 64.55,4.27 ; v1(64.21,3.94) 63.88,3.6 ; v1(64.21,3.94) 63.88,4.27 ; 63.88,8.85 v1(64.21,8.51) ; v1(64.21,8.51) 63.88,8.17 ; v1(64.21,8.51) 64.55,8.85 ; v1(64.21,8.51) 64.55,8.17 ; v1(62.71,24.13) 63.05,24.47 ; v1(62.71,24.13) 62.38,23.79 ; v1(62.71,24.13) 63.05,23.79 ; v1(62.71,24.13) 62.38,24.47 ; v1(62.71,24.13) R79.1 ; J22.2 60.2,6.86 ; J22.2 58.93,5.59 ; J22.2 57.66,6.86 ; J22.2 58.93,8.13 ; 57.73,12.1 v1(58.06,11.77) ; v1(58.06,11.77) 57.73,11.43 ; v1(58.06,11.77) GPS1.10 60.87,11.77 61.14,12.04 C112.1 ; v1(58.06,11.77) 58.4,11.43 ; v1(58.06,11.77) 58.4,12.1 ; 60.07,8.08 v1(60.4,7.75) ; v1(60.4,7.75) 60.07,7.41 ; v1(60.4,7.75) 60.74,8.08 ; v1(60.4,7.75) 60.74,7.41 ; 61.59,1.99 v1(61.93,1.65) ; v1(61.93,1.65) 62.26,1.99 ; v1(61.93,1.65) 62.26,1.32 ; v1(61.93,1.65) 61.59,1.32 ; 57.78,8.17 v1(58.12,8.51) ; v1(58.12,8.51) 58.45,8.85 ; v1(58.12,8.51) 58.45,8.17 ; v1(58.12,8.51) 57.78,8.85 ; v1(63.45,16.89) 63.79,16.56 ; v1(63.45,16.89) 63.79,17.23 ; v1(63.45,16.89) 63.11,17.23 ; v1(63.45,16.89) 63.11,16.56 ; v1(64.21,11.56) 64.55,11.22 ; v1(64.21,11.56) 63.88,11.89 ; v1(64.21,11.56) 64.55,11.89 ; v1(64.21,11.56) 63.88,11.22 ; 58.54,15.03 v1(58.88,15.37) ; v1(58.88,15.37) 58.54,15.7 ; v1(58.88,15.37) 59.21,15.03 ; v1(58.88,15.37) 59.21,15.7 ; 63.88,12.75 v1(64.21,13.08) ; v1(64.21,13.08) 63.88,13.42 ; v1(64.21,13.08) 64.55,12.75 ; v1(64.21,13.08) 64.55,13.42 ; J22.5 58.93,3.05 ; J22.5 58.93,0.51 ; J22.5 60.2,1.78 ; J22.5 57.66,1.78 ; v1(58.12,3.94) 58.45,4.27 ; v1(58.12,3.94) 57.78,4.27 ; v1(58.12,3.94) 57.78,3.6 ; v1(58.12,3.94) 58.45,3.6 ; 59.3,8.85 v1(59.64,8.51) ; v1(59.64,8.51) 59.3,8.17 ; v1(59.64,8.51) 59.98,8.17 ; v1(59.64,8.51) 59.98,8.85 ; 59.21,24.85 v1(58.88,24.51) 58.54,24.85 ; v1(63.45,4.7) 63.79,5.04 ; v1(63.45,4.7) 63.11,5.04 ; v1(63.45,4.7) 63.79,4.36 ; v1(63.45,4.7) 63.11,4.36 ; 62.54,6.32 v1(62.2,6.65) 62.54,6.99 ; J22.4 65.28,1.78 ; J22.4 62.74,1.78 ; J22.4 64.01,3.05 ; J22.4 64.01,0.51 ; 64.01,5.59 J22.3 ; J22.3 62.74,6.86 ; J22.3 65.28,6.86 ; 63.11,18.08 v1(63.45,18.42) ; v1(63.45,18.42) 63.79,18.08 ; v1(63.45,18.42) 63.11,18.75 ; v1(63.45,18.42) 63.79,18.75 ; v1(58.12,16.13) 58.45,16.47 ; v1(58.12,16.13) 57.78,15.79 ; v1(58.12,16.13) 57.78,16.47 ; v1(58.12,16.13) 58.45,15.79 ; 59.98,15.79 v1(59.64,16.13) 59.3,15.79 ; v1(60.4,6.22) 60.74,5.89 ; v1(60.4,6.22) 60.07,5.89 ; v1(60.4,6.22) 60.74,6.56 ; v1(58.06,16.97) 58.4,17.3 ; v1(58.06,16.97) 58.4,16.63 ; v1(58.06,16.97) 57.73,17.3 ; v1(58.06,16.97) 57.73,16.63 ; v1(58.06,16.97) GPS1.7 R56.1 ; v1(64.21,14.61) 64.55,14.94 ; v1(64.21,14.61) 64.55,14.27 ; v1(64.21,14.61) 63.88,14.27 ; v1(64.21,14.61) 63.88,14.94 ; v1(61.16,0.89) 61.5,1.23 ; v1(61.16,0.89) 61.5,0.55 ; v1(61.16,0.89) 60.83,0.55 ; v1(61.16,0.89) 60.83,1.23 ; R56.1 61.61,16.97 ; R56.1 61.14,17.41 ; R79.1 63.37,25.15 ; R79.1 62.05,25.15 ; v1(58.88,4.7) 59.21,5.04 ; v1(58.88,4.7) 59.21,4.36 ; v1(58.88,4.7) 58.54,4.36 ; v1(58.88,4.7) 58.54,5.04 ; 60.83,2.08 v1(61.16,2.41) ; v1(61.16,2.41) 61.5,2.08 ; v1(61.16,2.41) 60.83,2.75
